# Altium PCB dsau-motherboard-revA.PcbDoc (part 1 of 4)
Units mil, origin at the board's own origin, x right, y up, seen from the top; angles counter-clockwise.
Board outline 9475 x 6400 mil, 4 copper layers (Component Side, Ground Plane, Power Plane, Solder Side), stack 65.2 mil thick; 212 components, 202 nets, 998 pads, 1047 vias.
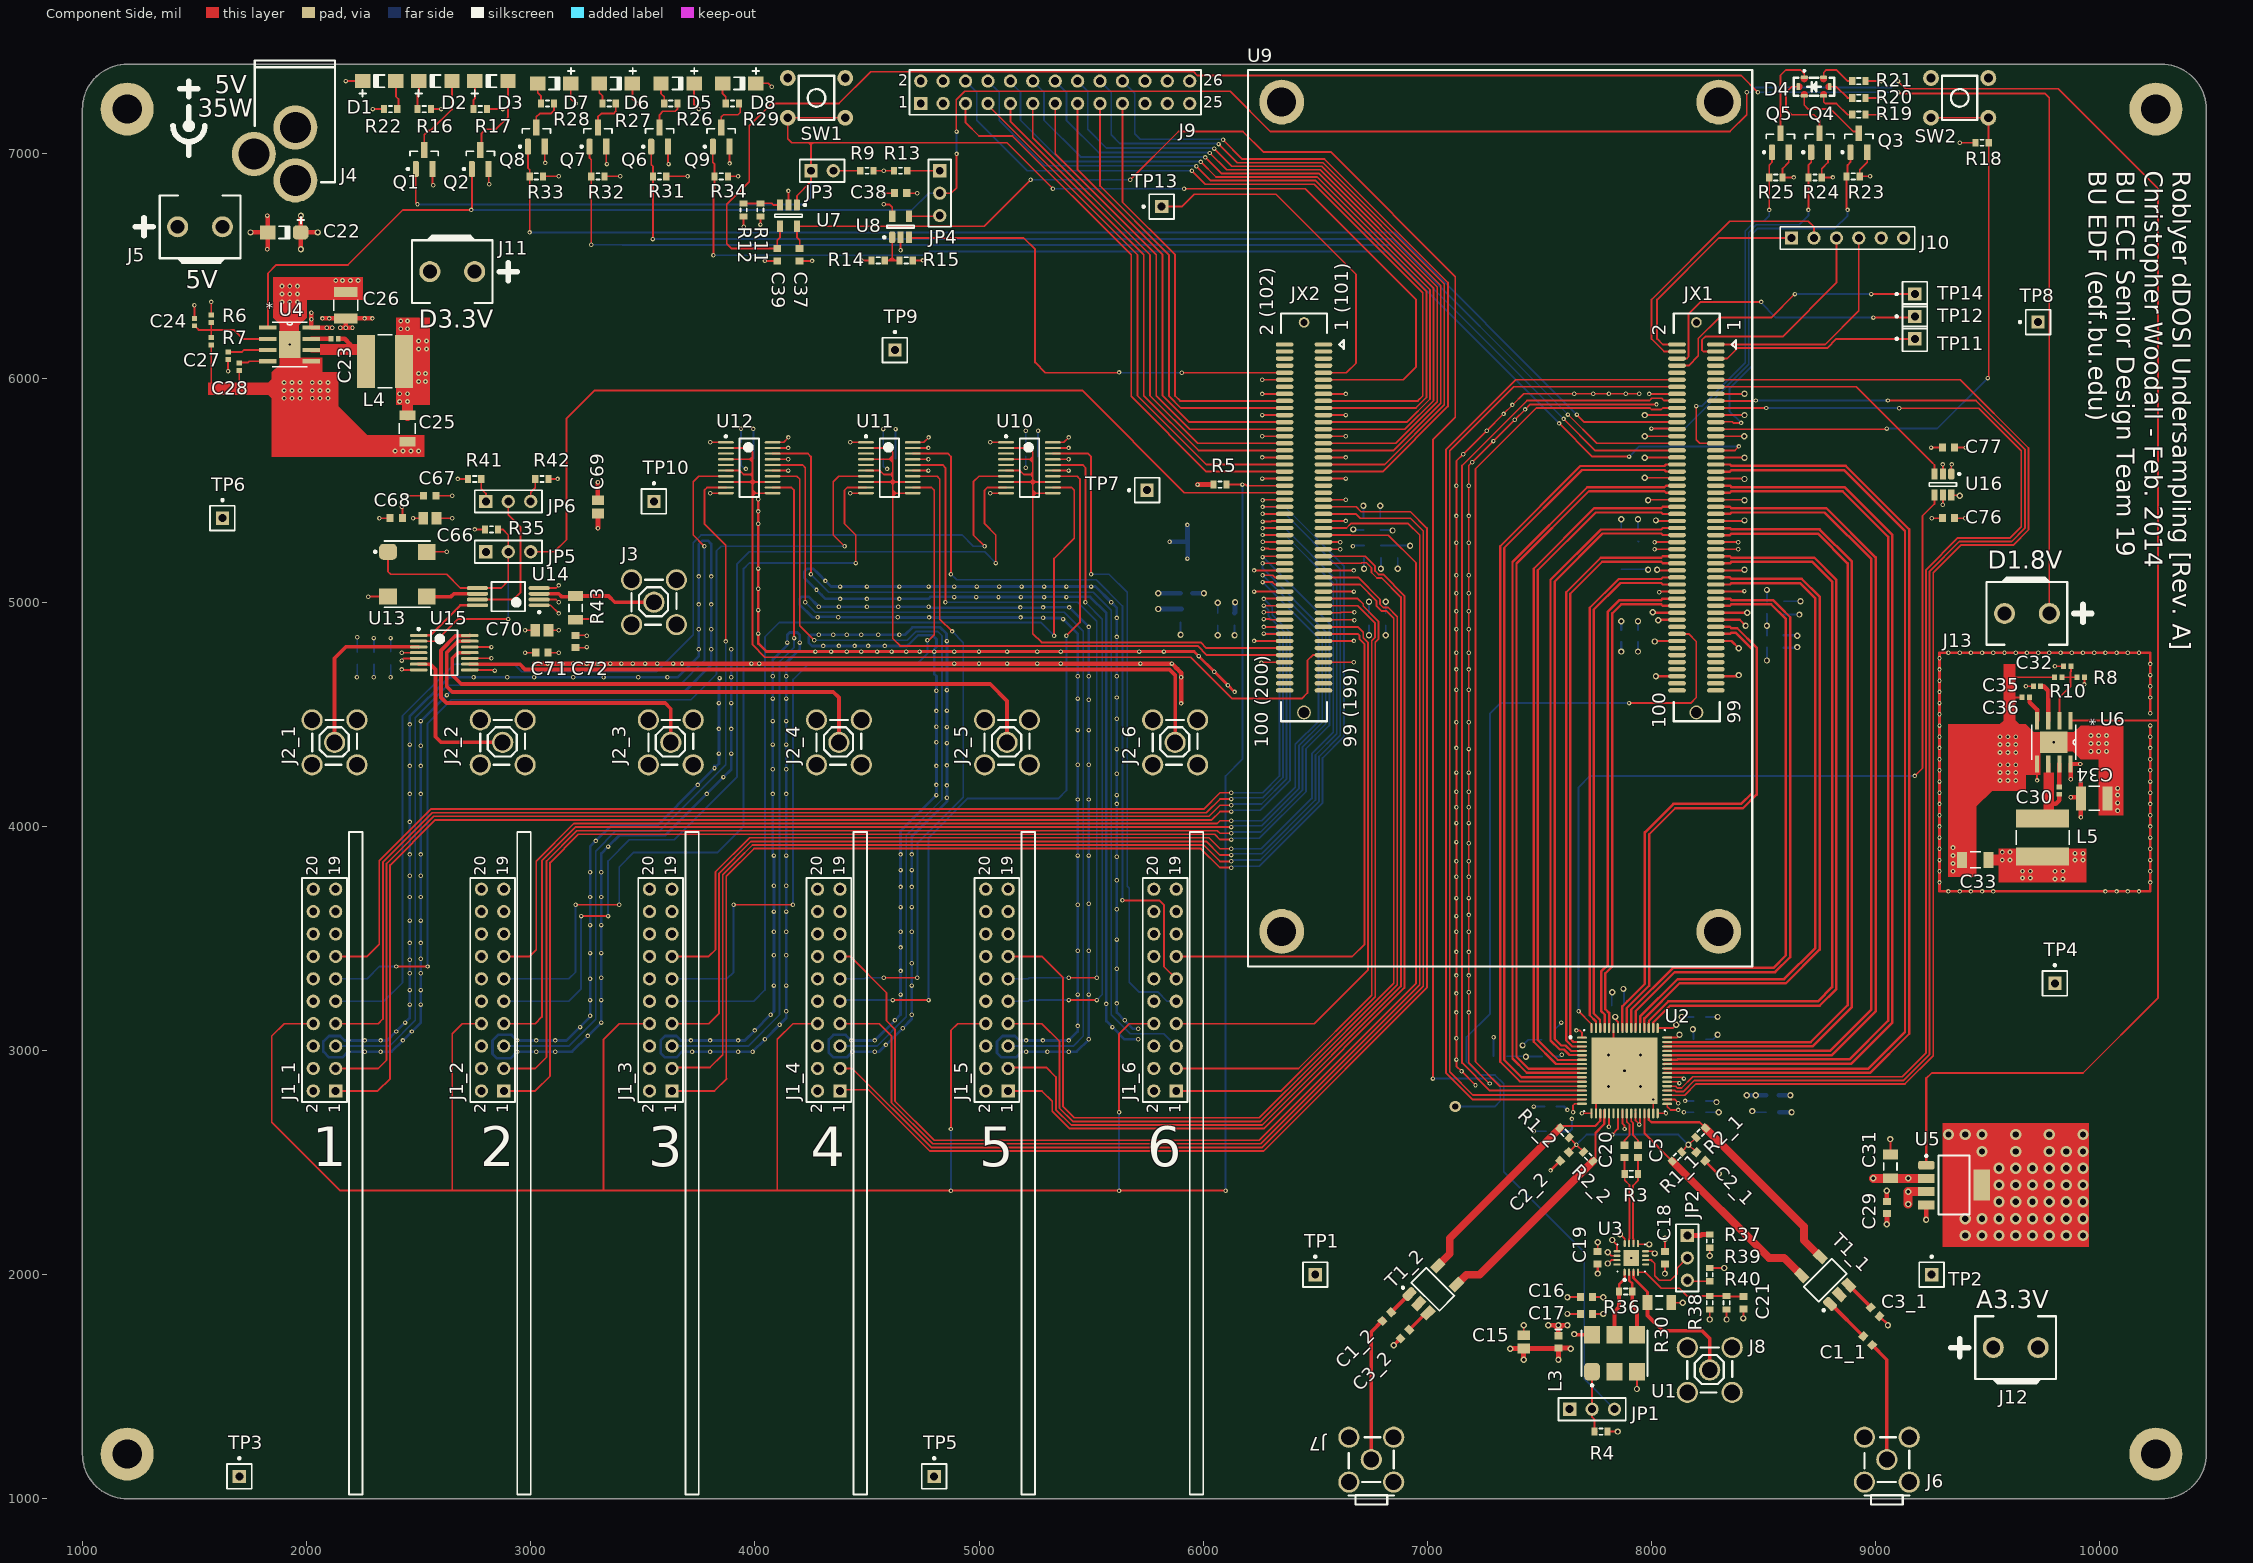
[diagram p0: Component Side view]
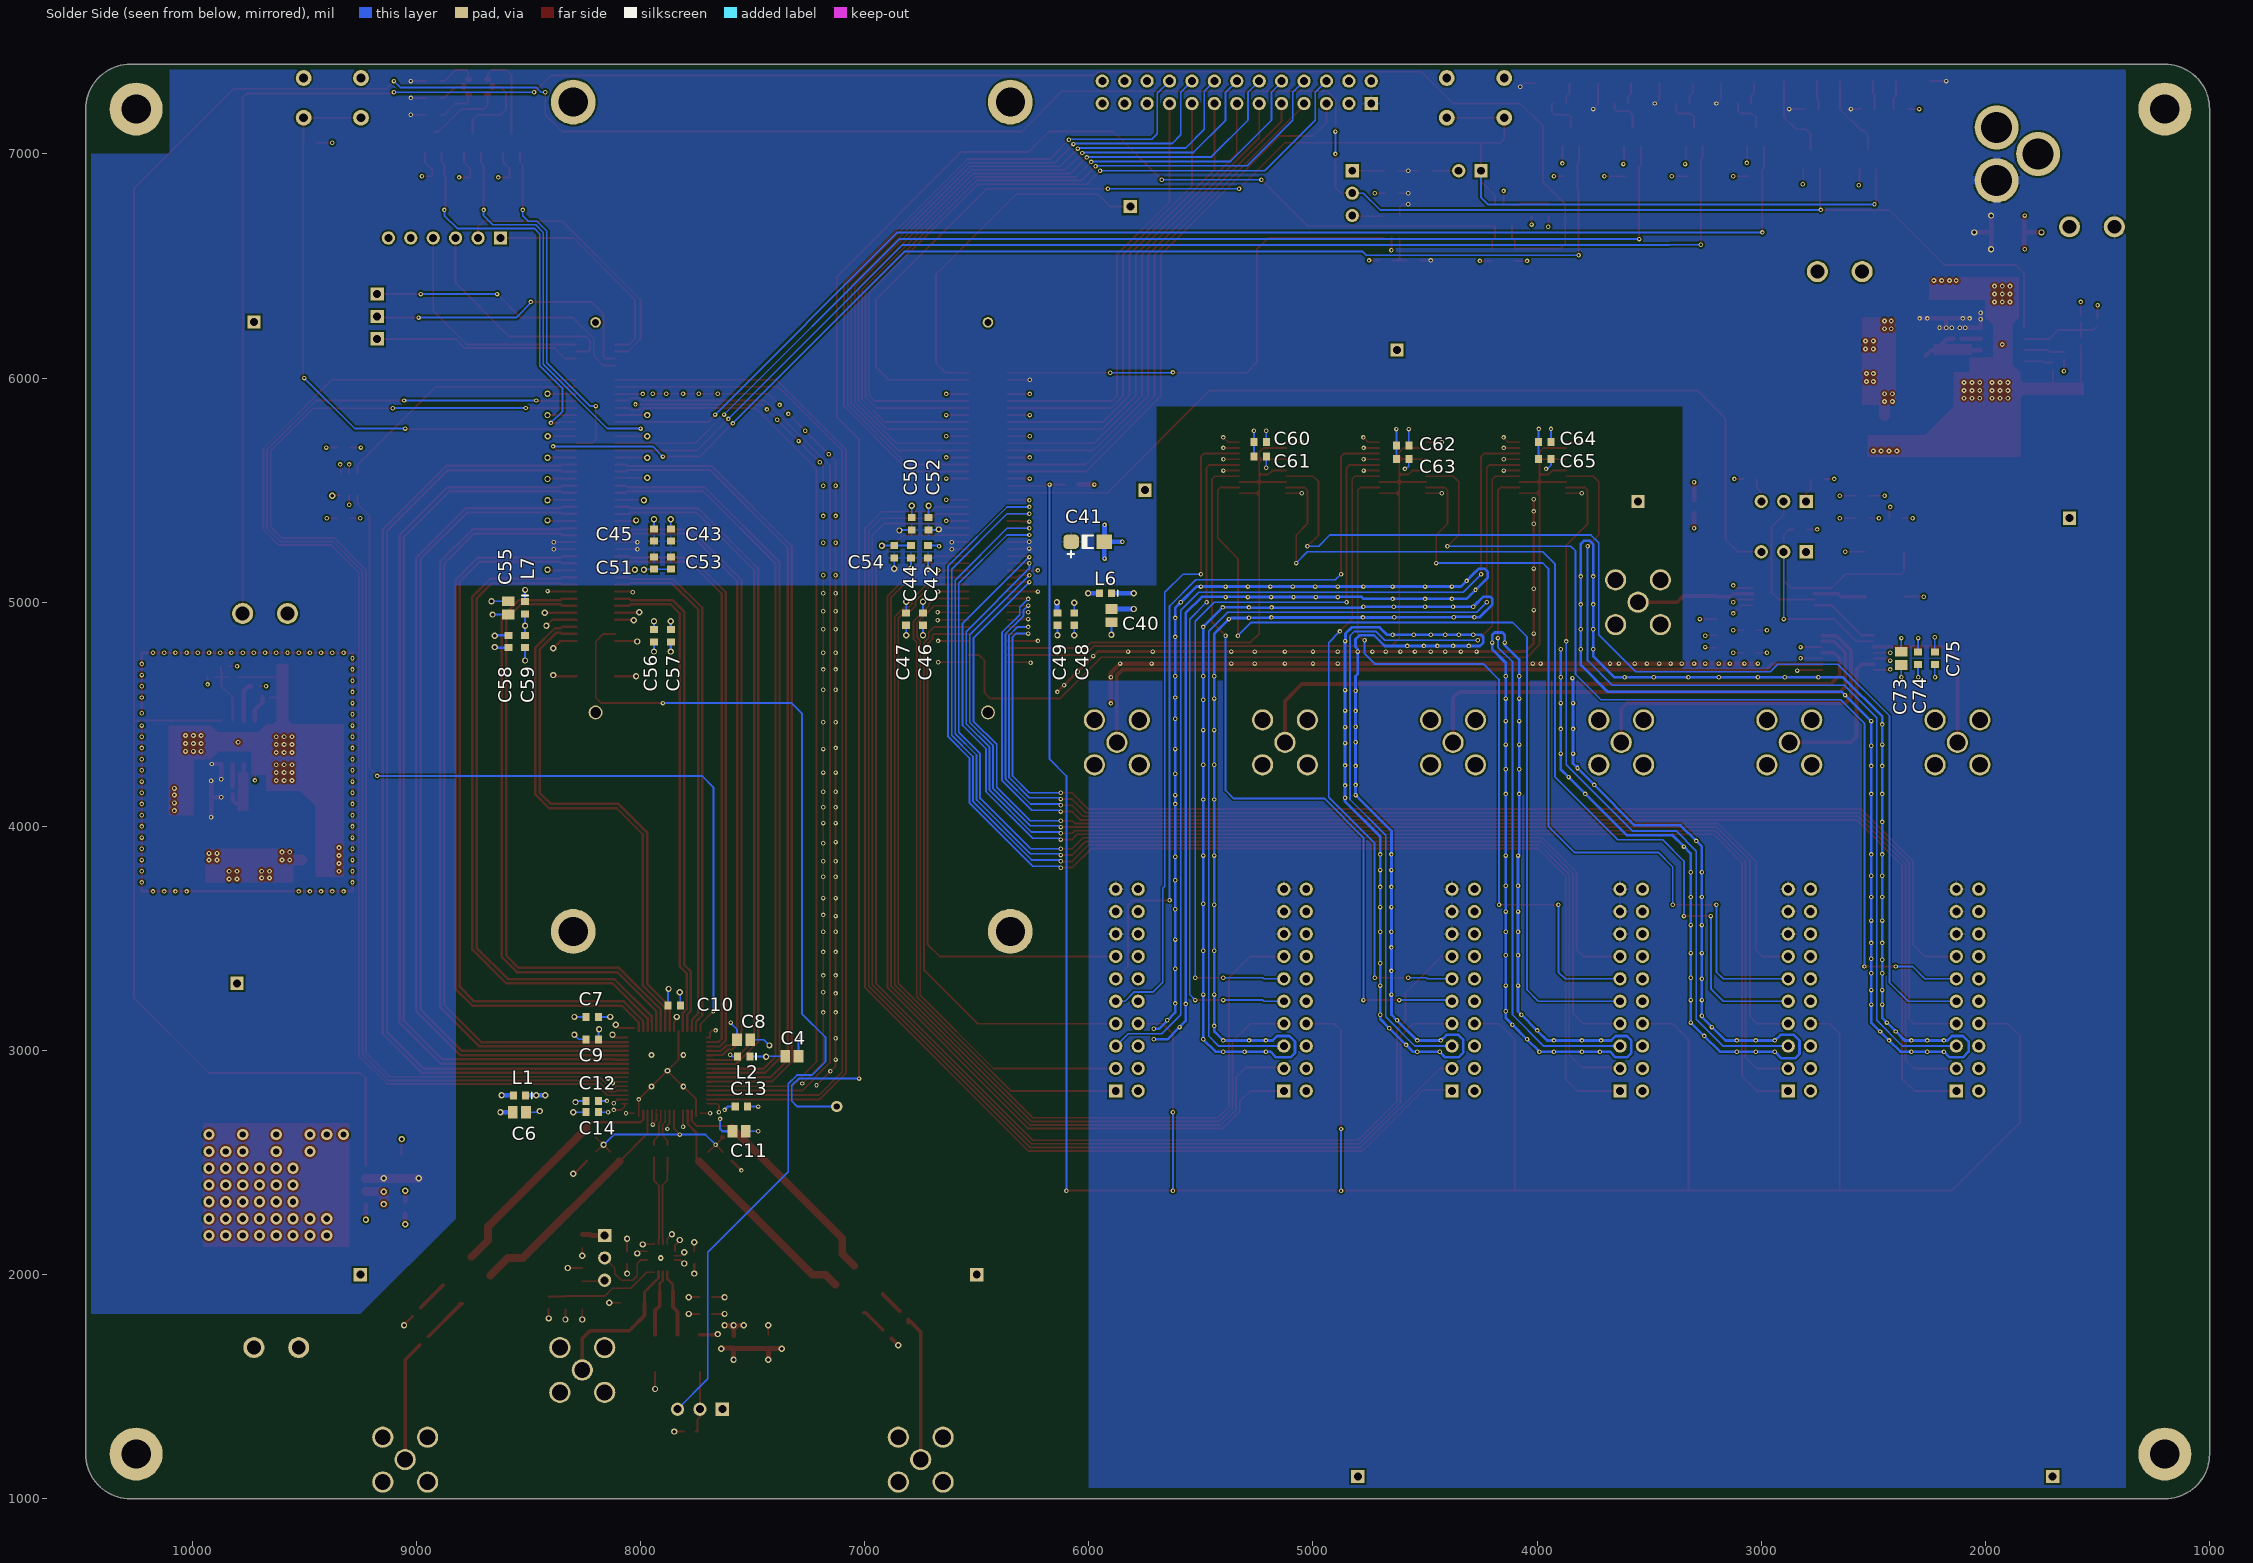
[diagram p1: Solder Side view, seen from below]
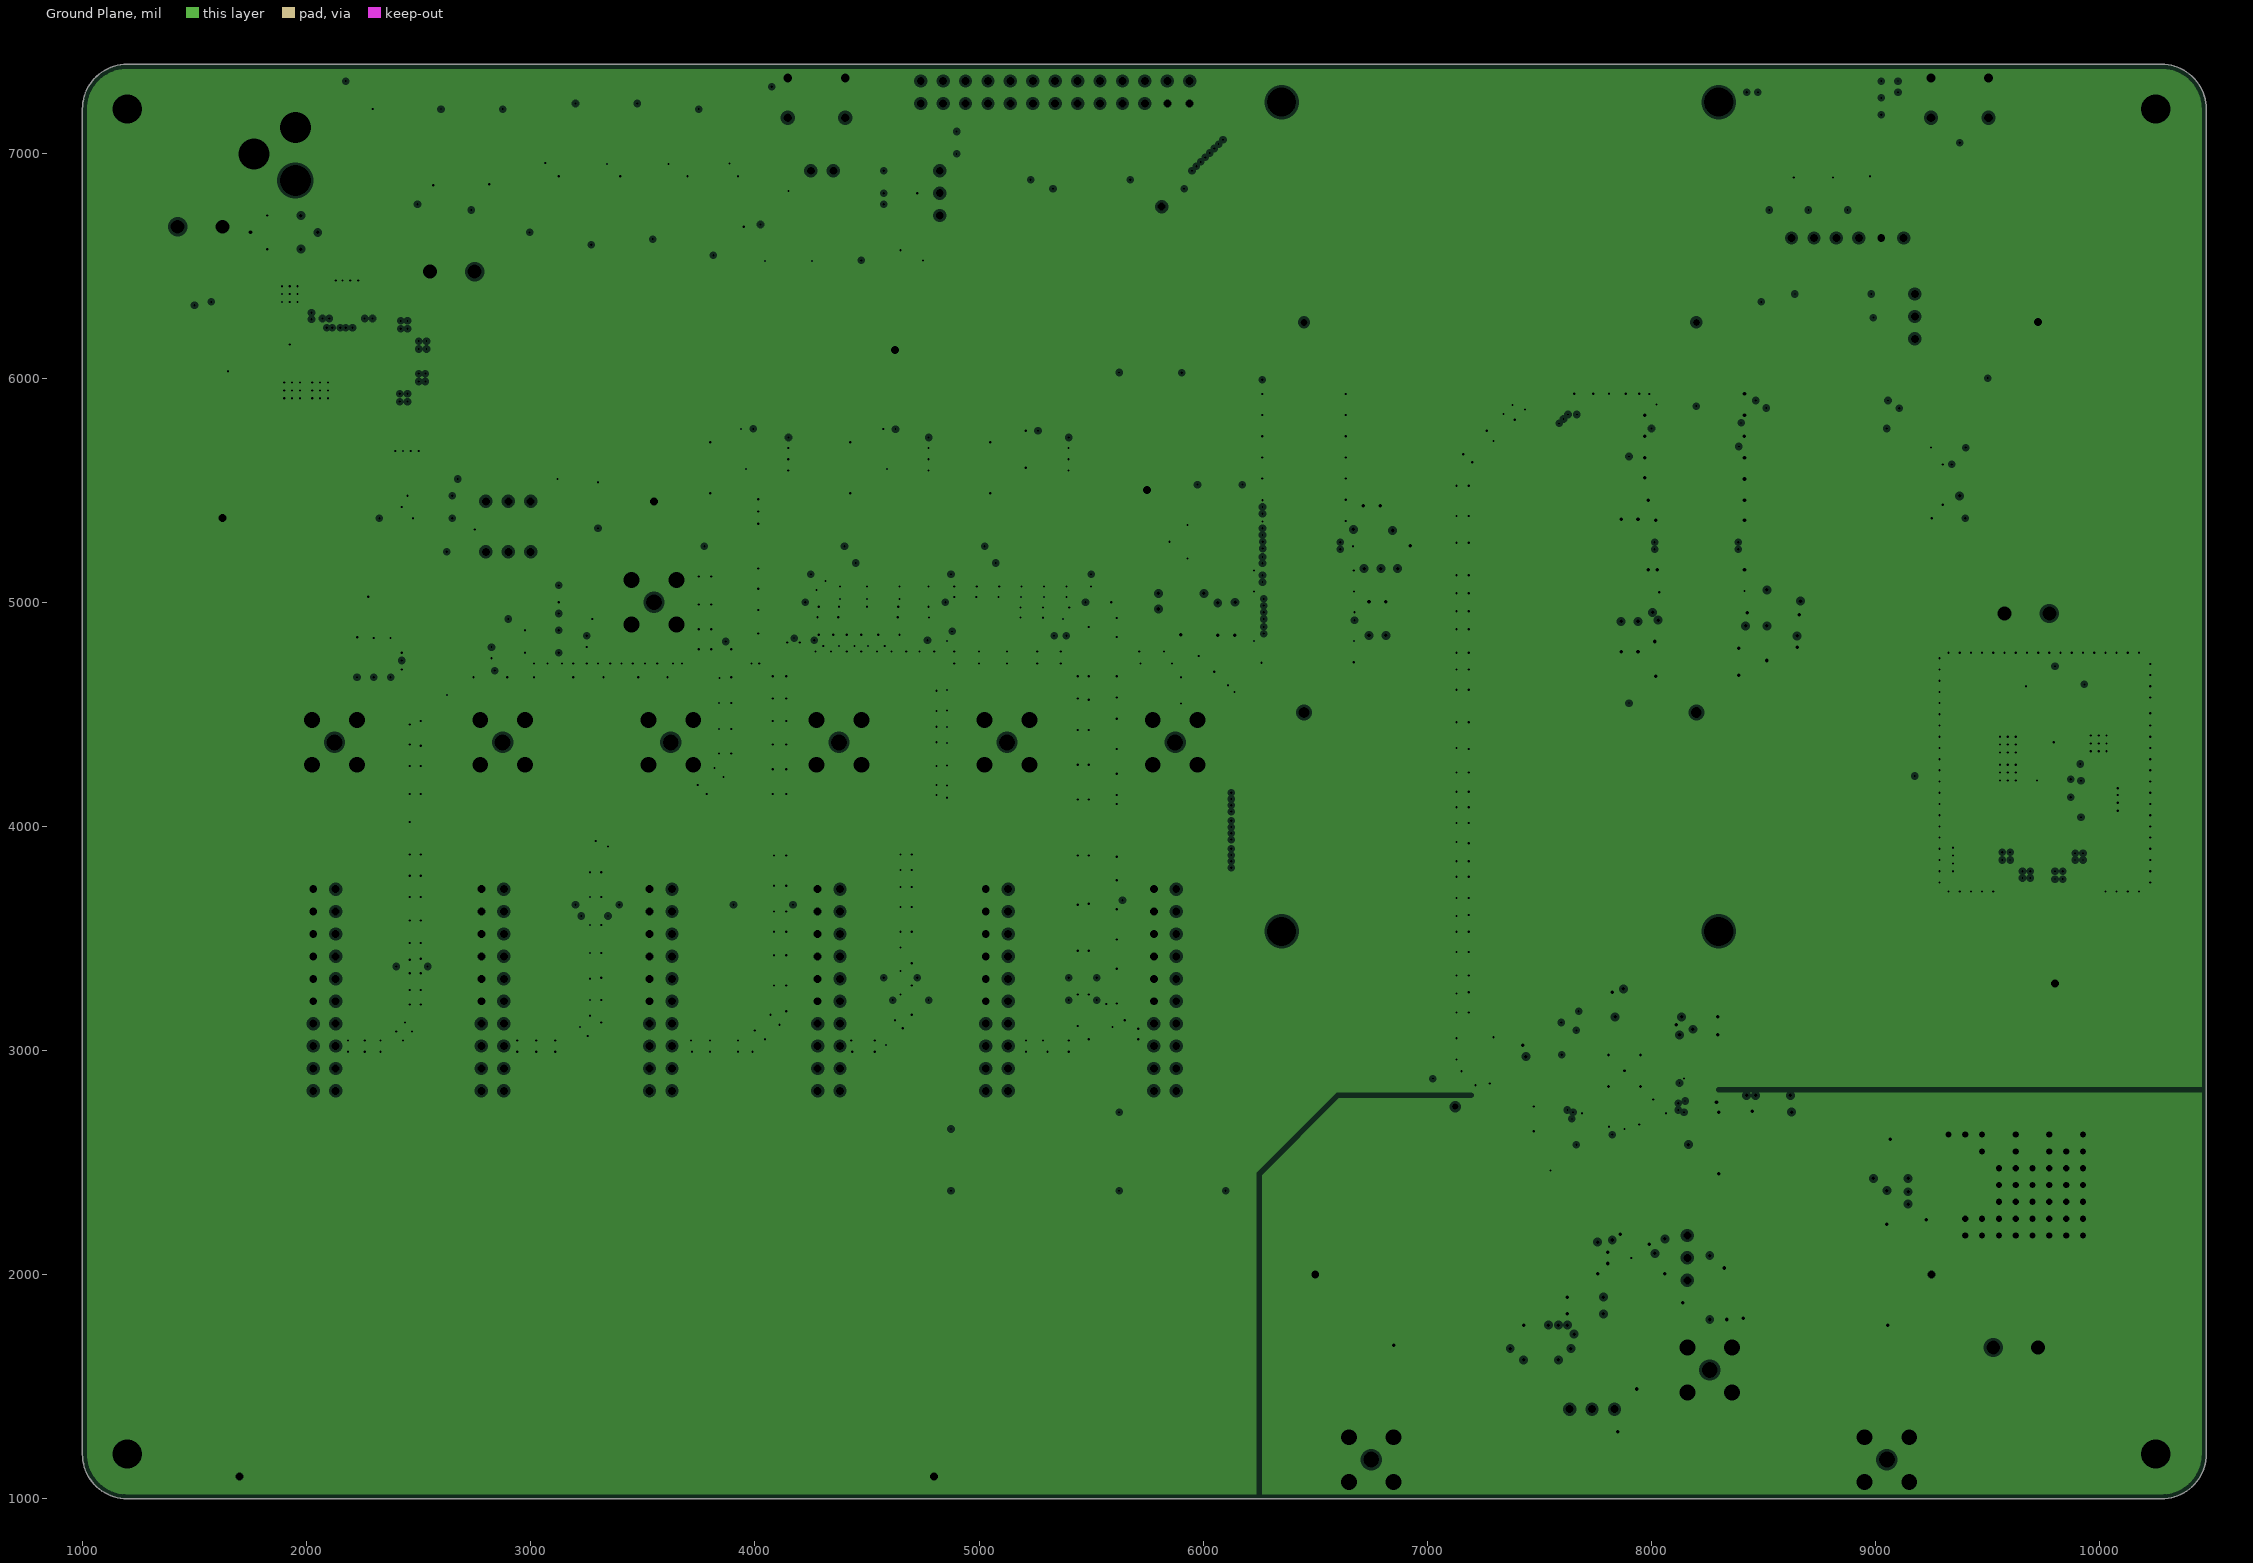
[diagram p2: Ground Plane, clearances drawn from the general rule]
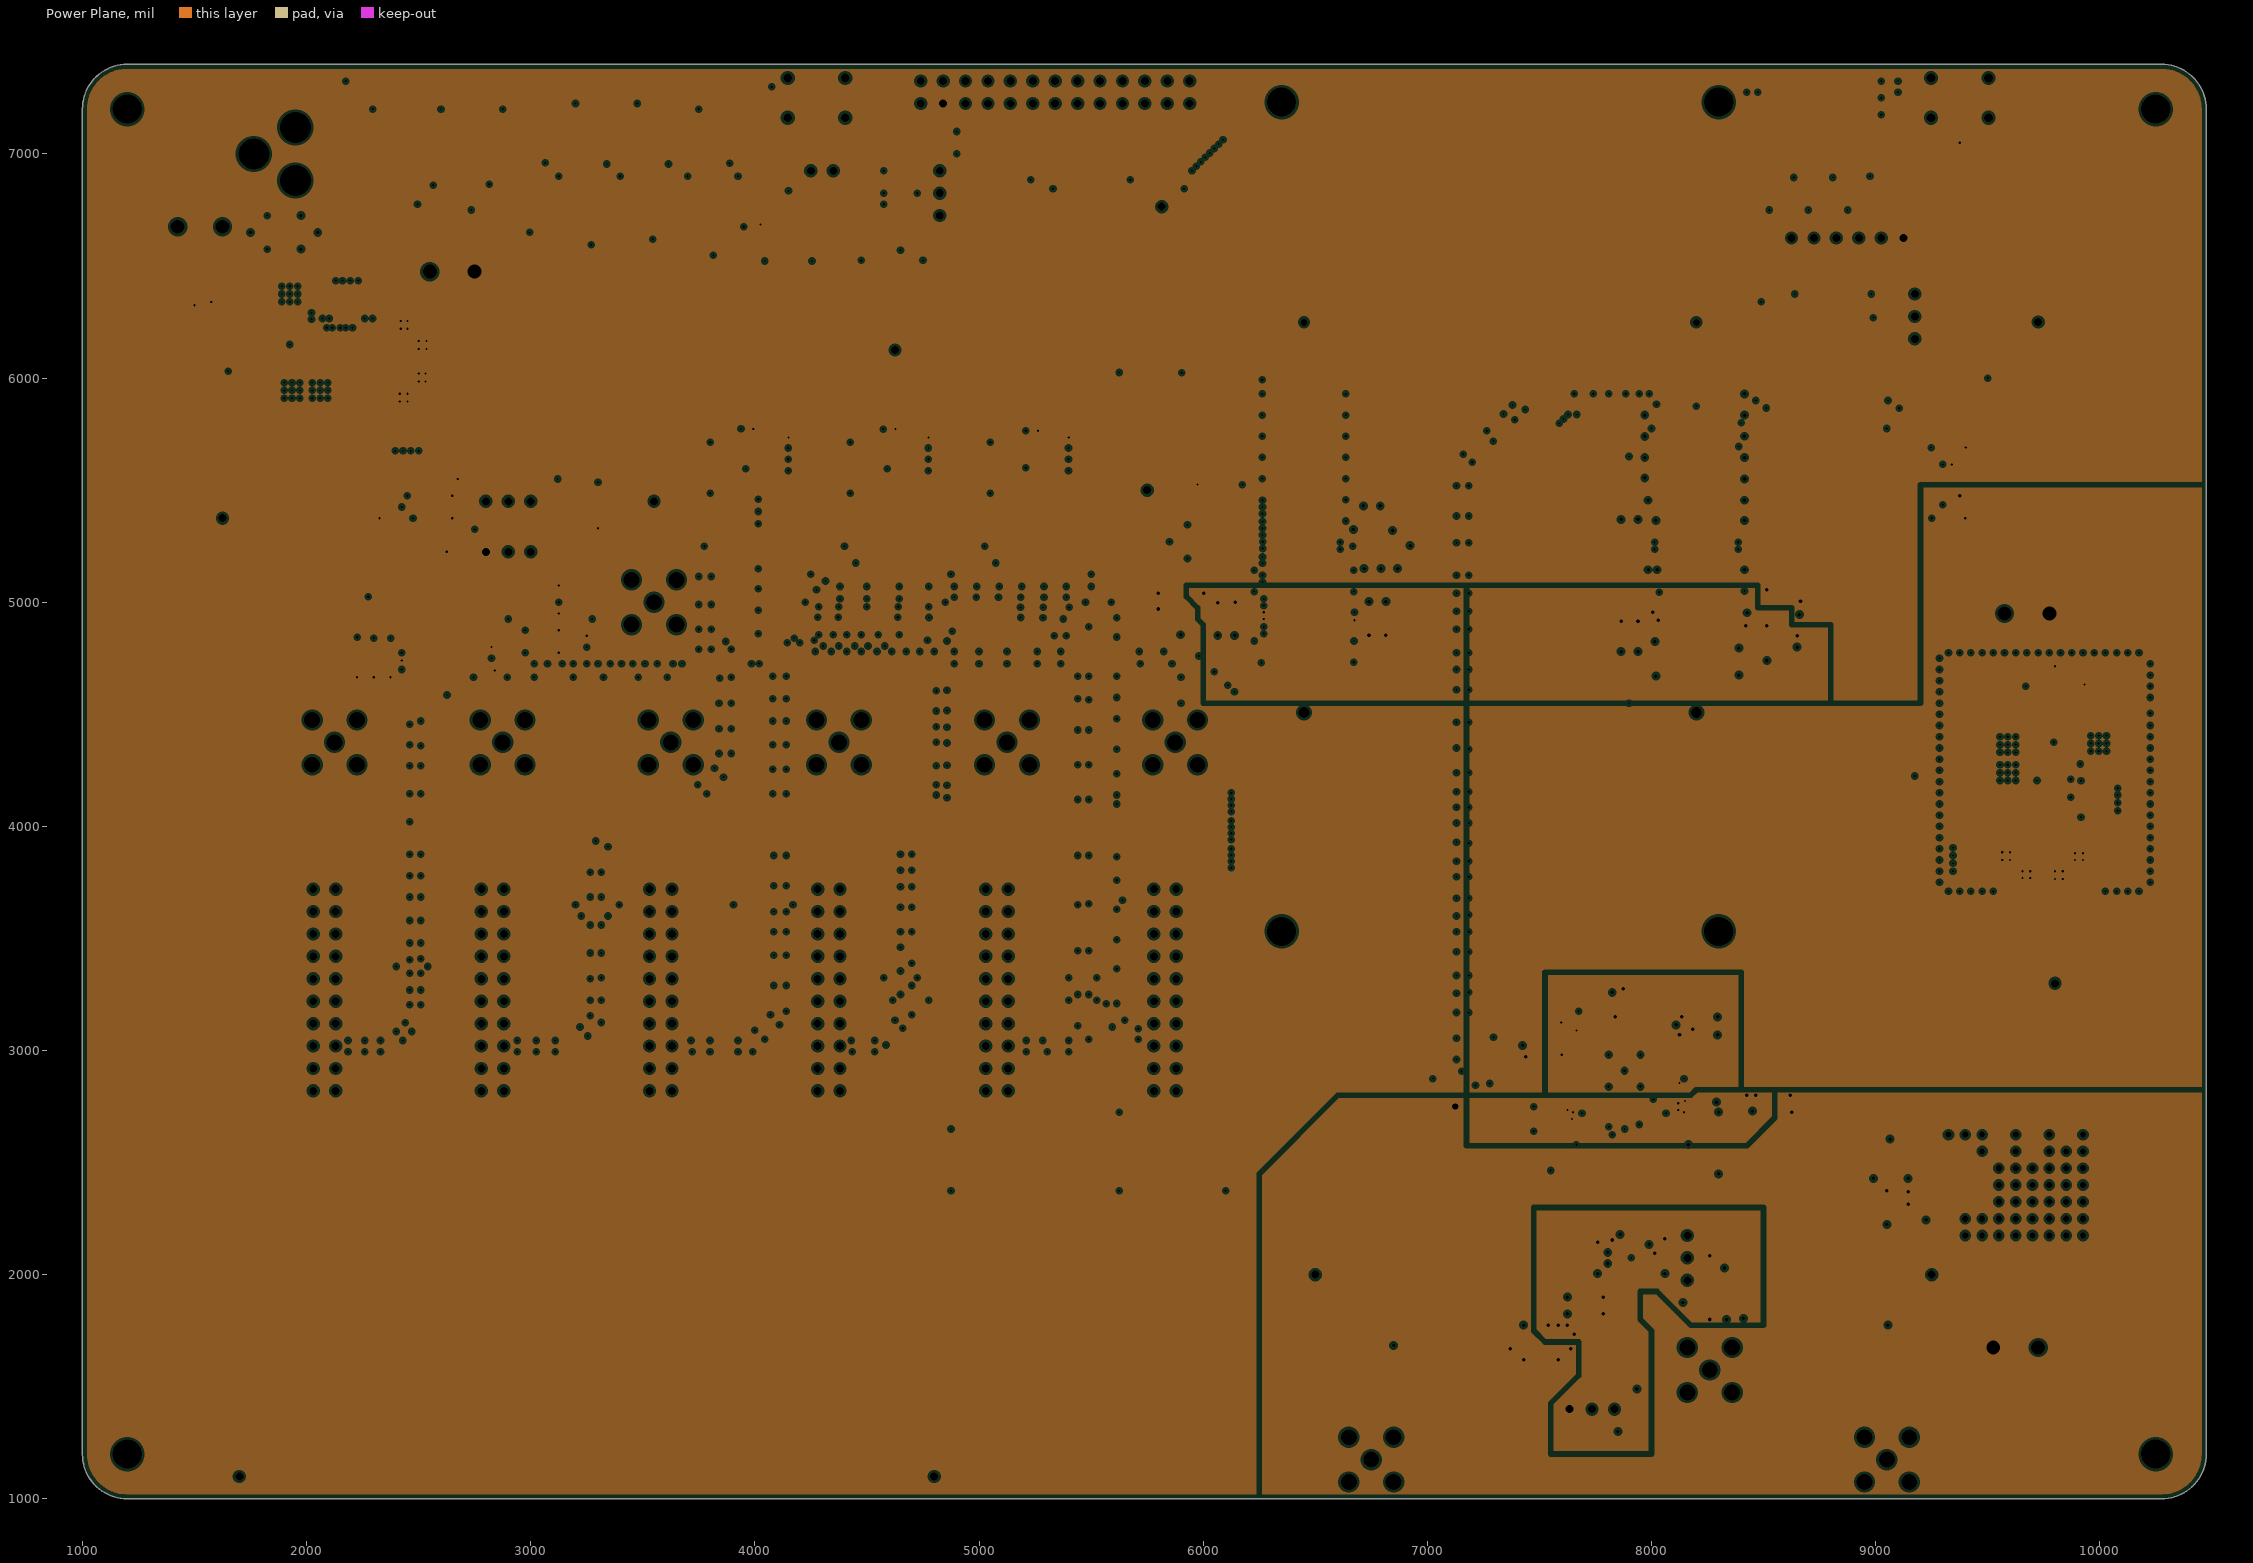
[diagram p3: Power Plane, clearances drawn from the general rule]

## Layer stack, top to bottom
Component Side: signal copper 1.4
Dielectric: prepreg 9.8, FR-4, Dk 4.3
Ground Plane: plane copper 1.4, net GND
Dielectric: core 40, FR-4, Dk 4.3
Power Plane: plane copper 1.4, net (Multiple Nets)
Dielectric: prepreg 9.8, FR-4, Dk 4.3
Solder Side: signal copper 1.4

## Board outline
1000,1200 1000,7200 cw(c1200,7200) 1200,7400 10275,7400 cw(c10275,7200) 10475,7200 10475,1200 cw(c10275,1200) 10275,1000 1200,1000 cw(c1200,1200)

## Design rules (kind name [scope] priority, off if disabled: settings)
Clearance Clearance_1 [IsPad vs IsPad] p1: gap=6
Clearance [All] p2: gap=8
DiffPairsRouting DiffPairsRouting_50Ohms [InNetClass('50OhmsDiff')] p1: maxlimit=10 minlimit=10 mostfreqgap=10 maxuncoupledlength=500
DiffPairsRouting DiffPairsRouting_100Ohms [InNetClass('100OhmsDiff')] p2: maxlimit=20 minlimit=8 mostfreqgap=8 maxuncoupledlength=500
DiffPairsRouting [All] p3: maxlimit=20 minlimit=8 mostfreqgap=8 maxuncoupledlength=500
HoleSize [All] p1: absolutevalues=TRUE maxlimit=1000 minlimit=10 maxpercent=80.000 minpercent=20.000
HoleToHoleClearance [All] p1: gap=8 allowstackedmicrovias=TRUE
MinimumSolderMaskSliver [All] p1: minsoldermaskwidth=6
PlaneClearance [All] p1: clearance=12
PlaneConnect PlaneConnect_2 [(InComponent('J4'))] p1: planeconnectstyle=Relief reliefexpansion=20 reliefentries=4 reliefconductorwidth=40 reliefairgap=10
PlaneConnect PlaneConnect_1 [IsVia] p2: planeconnectstyle=Direct reliefexpansion=20 reliefentries=4 reliefconductorwidth=10 reliefairgap=10
PlaneConnect [All] p3: planeconnectstyle=Relief reliefexpansion=20 reliefentries=4 reliefconductorwidth=10 reliefairgap=10
PolygonConnect [(InComponent('J4'))] p1: connectstyle=Relief reliefconductorwidth=40 reliefentries=4 polygonreliefangle="90 Angle"
PolygonConnect PolygonConnect_1 [IsVia] p2: connectstyle=Direct reliefconductorwidth=10 reliefentries=4 polygonreliefangle="90 Angle"
PolygonConnect PolygonConnect_5VPlane [InNet('5V')] p3: connectstyle=Relief reliefconductorwidth=10 reliefentries=4 polygonreliefangle="90 Angle"
RoomDefinition UZEDB34 [InComponentClass('UZEDB34')] p1: confinementstyle=ConfineIn formatcopy=TRUE lockcomponents=FALSE outline 9650,5000 9650,4325 9975,4325 9975,5000
RoomDefinition UZEDB35 [InComponentClass('UZEDB35')] p2: confinementstyle=ConfineIn formatcopy=TRUE lockcomponents=FALSE outline 3800,5400 5600,5400 5600,5875 3800,5875
RoomDefinition UZED [InComponentClass('UZED')] p3: confinementstyle=ConfineIn formatcopy=TRUE lockcomponents=FALSE outline 1025,925 10500,925 10500,7350 1025,7350
RoomDefinition PWR [InComponentClass('PWR')] p4: confinementstyle=ConfineIn formatcopy=TRUE lockcomponents=FALSE outline 1150,1025 10350,1025 10350,7375 1150,7375
RoomDefinition INT [InComponentClass('INT')] p5: confinementstyle=ConfineIn formatcopy=TRUE lockcomponents=FALSE outline 1025,950 10400,950 10400,7375 1025,7375
RoomDefinition dsau-motherboard-top [InComponentClass('dsau-motherboard-top')] p6: confinementstyle=ConfineIn formatcopy=TRUE lockcomponents=FALSE outline 1000,1000 10000,1000 10000,7400 1000,7400
RoomDefinition DDSCONN6 [InComponentClass('DDSCONN6')] p7: confinementstyle=ConfineIn formatcopy=TRUE lockcomponents=FALSE outline 5250,950 6000,950 6000,4550 5250,4550
RoomDefinition DDSCONN5 [InComponentClass('DDSCONN5')] p8: confinementstyle=ConfineIn formatcopy=TRUE lockcomponents=FALSE outline 4500,950 5250,950 5250,4550 4500,4550
RoomDefinition DDSCONN4 [InComponentClass('DDSCONN4')] p9: confinementstyle=ConfineIn formatcopy=TRUE lockcomponents=FALSE outline 3750,950 4500,950 4500,4550 3750,4550
RoomDefinition DDSCONN3 [InComponentClass('DDSCONN3')] p10: confinementstyle=ConfineIn formatcopy=TRUE lockcomponents=FALSE outline 3000,950 3750,950 3750,4550 3000,4550
RoomDefinition DDSCONN2 [InComponentClass('DDSCONN2')] p11: confinementstyle=ConfineIn formatcopy=TRUE lockcomponents=FALSE outline 2250,950 3000,950 3000,4550 2250,4550
RoomDefinition DDSCONN1 [InComponentClass('DDSCONN1')] p12: confinementstyle=ConfineIn formatcopy=TRUE lockcomponents=FALSE outline 1500,950 2250,950 2250,4550 1500,4550
RoomDefinition DDSCLK [InComponentClass('DDSCLK')] p13: confinementstyle=ConfineIn formatcopy=TRUE lockcomponents=FALSE outline 2250,4625 3625,4625 3625,5625 2250,5625
RoomDefinition AFE2 [InComponentClass('AFE2')] p14: confinementstyle=ConfineIn formatcopy=TRUE lockcomponents=FALSE outline 7775,1375 7775,2375 7025,2375 7025,1375
RoomDefinition AFE1 [InComponentClass('AFE1')] p15: confinementstyle=ConfineIn formatcopy=TRUE lockcomponents=FALSE outline 9525,2000 8675,2000 8675,675 9525,675
RoomDefinition ADC [InComponentClass('ADC')] p16: confinementstyle=ConfineIn formatcopy=TRUE lockcomponents=FALSE outline 7025,1375 9300,1375 9300,3575 7025,3575
RoutingVias [All] p1: holewidth=12 width=20 viastyle="Through Hole" minholewidth=12 minwidth=20 maxholewidth=12 maxwidth=20
SilkscreenOverComponentPads [All] p1: minsilkscreentomaskgap=10
SolderMaskExpansion ViaSolderMask [IsVia] p1: expansion=1
SolderMaskExpansion [All] p2: expansion=3
Width Width_25Ohms [InNetClass('50OhmsDiff')] p1: maxlimit=40.54 minlimit=8.39 preferedwidth=35.12 impedancedriven=TRUE minimp=20.000000 maximp=72.000000 favimp=25.000000
Width Width_50Ohms [InNetClass('50OhmsSingle')] p2: maxlimit=22.67 minlimit=11.23 preferedwidth=16.8 impedancedriven=TRUE minimp=40.000000 maximp=63.000000 favimp=50.000000
Width Width_100Ohms [InNetClass('100OhmsDiff')] p3: maxlimit=20 minlimit=8 preferedwidth=11 minimp=50.000000 maximp=50.000000 favimp=50.000000
Width [InNetClass('All Nets')] p4: maxlimit=60 minlimit=8 preferedwidth=8 minimp=50.000000 maximp=50.000000 favimp=50.000000
21 further rules are at their usual default settings.

## Classes and differential pairs
channel class dsau-dds-connector: DDSCONN1 DDSCONN2 DDSCONN3 DDSCONN4 DDSCONN5 DDSCONN6
channel class dsau-adc-frontend: AFE1 AFE2
net class PowerNet: 5V A3V3 D1V8 D3V3 NetC46_1 NetC56_1
net class GPIO[15..0]: GPIO0 GPIO1 GPIO2 GPIO3 GPIO4 GPIO5 GPIO6 GPIO7 GPIO8 GPIO9 GPIO10 GPIO11 GPIO12 GPIO13 GPIO14 GPIO15
net class CLK_OUT[5..0]: CLK_OUT0 CLK_OUT1 CLK_OUT2 CLK_OUT3 CLK_OUT4 CLK_OUT5
net class 100OhmsDiff: ADCCLK1_N ADCCLK1_P ADCCLK2_N ADCCLK2_P ADCCLK_N ADCCLK_P CLKOUT_N CLKOUT_P DA0_N DA0_P DA2_N DA2_P DA4_N DA4_P DA6_N DA6_P DA8_N DA8_P DA10_N DA10_P DA12_N DA12_P DB0_N DB0_P DB2_N DB2_P DB4_N DB4_P DB6_N DB6_P DB8_N DB8_P DB10_N DB10_P DB12_N DB12_P
net class 50OhmsSingle: CLK_OUT0 CLK_OUT1 CLK_OUT2 CLK_OUT3 CLK_OUT4 CLK_OUT5 NetC1_1_1 NetC1_1_2 NetC1_2_1 NetC1_2_2 NetC3_1_2 NetC3_2_2 NetJ3_1 NetJ8_1 NetU13_3 NetU14_8
net class 50OhmsDiff: INPUTA_N INPUTA_P INPUTB_N INPUTB_P
component class UZED: C40 C41 C42 C43 C44 C45 C46 C47 C48 C49 C50 C51 C52 C53 C54 C55 C56 C57 C58 C59 L6 L7 TP11 TP12 TP13 TP14 U9
component class UZEDB35: C60 C61 C62 C63 C64 C65 U10 U11 U12
component class PWR: C23 C24 C25 C26 C27 C28 C29 C30 C31 C32 C33 C34 C35 C36 C37 C38 C39 J11 J12 J13 JP3 JP4 L4 L5 R6 R7 R8 R9 R10 R11 R12 R13 R14 R15 SW1 TP1 TP2 TP3 TP4 TP5 TP6 TP7 TP8 TP9 TP10 U4 U5 U6 U7 U8
component class INT: D1 D2 D3 D4 D5 D6 D7 D8 Q1 Q2 Q3 Q4 Q5 Q6 Q7 Q8 Q9 R16 R17 R18 R19 R20 R21 R22 R23 R24 R25 R26 R27 R28 R29 R31 R32 R33 R34 SW2
component class dsau-motherboard-top: C22 J3 J4 J5 J6 J7 J8 J9 J10 R5
component class DDSCONN6: J1_6 J2_6
component class DDSCONN5: J1_5 J2_5
component class DDSCONN4: J1_4 J2_4
component class DDSCONN3: J1_3 J2_3
component class DDSCONN2: J1_2 J2_2
component class DDSCONN1: J1_1 J2_1
component class DDSCLK: C66 C67 C68 C69 C70 C71 C72 C73 C74 C75 JP5 JP6 R35 R41 R42 R43 U13 U14 U15
component class AFE2: C1_2 C2_2 C3_2 R1_2 R2_2 T1_2
component class AFE1: C1_1 C2_1 C3_1 R1_1 R2_1 T1_1
component class ADC: C4 C5 C6 C7 C8 C9 C10 C11 C12 C13 C14 C15 C16 C17 C18 C19 C20 C21 JP1 JP2 L1 L2 L3 R3 R4 R30 R36 R37 R38 R39 R40 U1 U2 U3
component class UZEDB34: C76 C77 U16
differential pair INPUTB: +INPUTB_P -INPUTB_N
differential pair INPUTA: +INPUTA_P -INPUTA_N
differential pair DB12: +DB12_P -DB12_N
differential pair DB10: +DB10_P -DB10_N
differential pair DB8: +DB8_P -DB8_N
differential pair DB6: +DB6_P -DB6_N
differential pair DB4: +DB4_P -DB4_N
differential pair DB2: +DB2_P -DB2_N
differential pair DB0: +DB0_P -DB0_N
differential pair DA12: +DA12_P -DA12_N
differential pair DA10: +DA10_P -DA10_N
differential pair DA8: +DA8_P -DA8_N
differential pair DA6: +DA6_P -DA6_N
differential pair DA4: +DA4_P -DA4_N
differential pair DA2: +DA2_P -DA2_N
differential pair DA0: +DA0_P -DA0_N
differential pair CLKOUT: +CLKOUT_P -CLKOUT_N
differential pair ADCCLK: +ADCCLK_P -ADCCLK_N
differential pair ADCCLK2: +ADCCLK2_P -ADCCLK2_N
differential pair ADCCLK1: +ADCCLK1_P -ADCCLK1_N

## Components (designator, comment, footprint, x,y, rotation, side; value= is the part's Value field where it differs from the comment)
C1_1 "CER 0.1UF 50V Y5V" CAPC1608L 8965,1706 r135 top (schematic designator C1)
C1_2 "CER 0.1UF 50V Y5V" CAPC1608L 6819,1813 r45 top (schematic designator C1)
C2_1 "CER 0.1UF 50V Y5V" CAPC1608L 8220.03,2526.97 r315 top (schematic designator C2)
C2_2 "CER 0.1UF 50V Y5V" CAPC1608L 7611.97,2526.97 r225 top (schematic designator C2)
C3_1 "CER 0.1UF 50V Y5V" CAPC1608L 8998,1834 r135 top (schematic designator C3)
C3_2 "CER 0.1UF 50V Y5V" CAPC1608L 6900,1735 r45 top (schematic designator C3)
C4 "TANT 33UF 6.3V 10%" CAPC2012L 7325,2975 r180 bottom
C5 "CER 0.1UF 50V Y5V" CAPC1608L 7940,2550 r90 top
C6 "TANT 33UF 6.3V 10%" CAPC2012L 8540.03,2725 r180 bottom
C7 "CER 0.1UF 50V Y5V" CAPC1608L 8215,3150 r0 bottom
C8 "CER 1UF 16V 10% X7R" CAPC2012L 7540.03,3047.88 r180 bottom
C9 "CER 10NF 25V 10% NP0" CAPC1608L 8215.03,3050 r0 bottom
C10 "CER 10PF 50V 5% NP0" CAPC1608L 7850,3200 r180 bottom
C11 "CER 1UF 16V 10% X7R" CAPC2012L 7560,2640 r180 bottom
C12 "CER 0.1UF 50V Y5V" CAPC1608L 8215.03,2775 r0 bottom
C13 "CER 10NF 25V 10% NP0" CAPC1608L 7550,2750 r180 bottom
C14 "CER 10PF 50V 5% NP0" CAPC1608L 8215.03,2725 r0 bottom
C15 "TANT 33UF 6.3V 10%" CAPC2012L 7430,1700 r90 top
C16 "CER 10NF 25V 10% NP0" CAPC1608L 7710,1900 r180 top
C17 "CER 0.1UF 50V Y5V" CAPC1608L 7710,1825 r180 top
C18 "CER 0.1UF 50V Y5V" CAPC1608L 8060,2075 r270 top
C19 "CER 0.1UF 50V Y5V" CAPC1608L 7760,2075 r270 top
C20 "CER 0.1UF 50V Y5V" CAPC1608L 7880,2550 r90 top
C21 "CER 0.1UF 50V Y5V" CAPC1608L 8410,1875 r270 top
C22 "TANT 100UF 10V 20%" CAPPOL3216 1900,6650 r180 top
C23 "100nF" 0402 2125,6175 r0 top
C24 "5.1pF" 0402 1500,6250 r270 top
C25 "47uF" 1206 2450,5775 r270 top
C26 "22uF" 1210 2175,6325 r90 top
C27 "1uF" 0402 1650,6100 r270 top
C28 "8.2nF" 0402 1700,6050 r270 top
C29 "CER 10UF 6.3V 20% X5R" CAPC1608L 9050,2300 r90 top
C30 "100nF" 0402 9820,4160 r270 top
C31 "CER 68UF 6.3V 20% X5R" CAPC3216L 9066,2483 r270 top
C32 "5.1pF" 0402 9855,4714.65 r0 top
C33 "47uF" 1206 9445,3850.35 r180 top
C34 "22uF" 1210 9975,4125 r0 top
C35 "1uF" 0402 9720,4625.35 r180 top
C36 "8.2nF" 0402 9670,4575.35 r180 top
C37 "CER 0.1UF 50V Y5V" CAPC1608L 4200,6550 r270 top
C38 "CER 0.1UF 50V Y5V" CAPC1608L 4650,6825 r0 top
C39 "CER 0.1UF 50V Y5V" CAPC1608L 4100,6550 r90 top
C40 "TANT 33UF 6.3V 10%" CAPC2012L 5899.21,4940 r270 bottom
C41 "TANT 100UF 10V 20%" CAPPOL3216 6005,5270 r180 bottom
C42 "CER 0.1UF 50V Y5V" CAPC1608L 6718,5225 r90 bottom
C43 "CER 0.1UF 50V Y5V" CAPC1608L 7865.02,5300 r90 bottom
C44 "CER 0.1UF 50V Y5V" CAPC1608L 6793,5225 r90 bottom
C45 "CER 0.1UF 50V Y5V" CAPC1608L 7940.02,5300 r90 bottom
C46 "CER 0.1UF 50V Y5V" CAPC1608L 6740.02,4925 r90 bottom
C47 "CER 0.1UF 50V Y5V" CAPC1608L 6815.02,4925 r90 bottom
C48 "CER 10NF 25V 10% NP0" CAPC1608L 6065.02,4925 r270 bottom
C49 "CER 10PF 50V 5% NP0" CAPC1608L 6140.02,4925 r270 bottom
C50 "CER 10PF 50V 5% NP0" CAPC1608L 6790,5350 r90 bottom
C51 "CER 10PF 50V 5% NP0" CAPC1608L 7940.02,5175 r270 bottom
C52 "CER 10NF 25V 10% NP0" CAPC1608L 6715,5350 r90 bottom
C53 "CER 10NF 25V 10% NP0" CAPC1608L 7865.02,5175 r270 bottom
C54 "CER 10NF 25V 10% NP0" CAPC1608L 6868,5225 r90 bottom
C55 "TANT 33UF 6.3V 10%" CAPC2012L 8590.02,4975 r270 bottom
C56 "CER 0.1UF 50V Y5V" CAPC1608L 7940.02,4850 r270 bottom
C57 "CER 0.1UF 50V Y5V" CAPC1608L 7865.02,4850 r270 bottom
C58 "CER 10NF 25V 10% NP0" CAPC1608L 8590.02,4825 r270 bottom
C59 "CER 10PF 50V 5% NP0" CAPC1608L 8515.02,4825 r270 bottom
C60 "CER 0.1UF 50V Y5V" CAPC1608L 5235.79,5715 r0 bottom
C61 "CER 10NF 25V 10% NP0" CAPC1608L 5235.79,5650 r180 bottom
C62 "CER 0.1UF 50V Y5V" CAPC1608L 4600,5699.98 r0 bottom
C63 "CER 10NF 25V 10% NP0" CAPC1608L 4600,5639.98 r180 bottom
C64 "CER 0.1UF 50V Y5V" CAPC1608L 3965.79,5715 r0 bottom
C65 "CER 10NF 25V 10% NP0" CAPC1608L 3965.79,5640 r180 bottom
C66 "CER 1UF 16V 10% X7R" CAPC2012L 2550,5375 r180 top
C67 "CER 0.1UF 50V Y5V" CAPC1608L 2550,5475 r180 top
C68 "CER 10PF 50V 5% NP0" CAPC1608L 2400,5375 r0 top
C69 "TANT 33UF 6.3V 10%" CAPC2012L 3300,5425 r90 top
C70 "CER 1UF 16V 10% X7R" CAPC2012L 3050,4875 r180 top
C71 "CER 0.1UF 50V Y5V" CAPC1608L 3050,4775 r180 top
C72 "CER 10PF 50V 5% NP0" CAPC1608L 3200,4825 r270 top
C73 "CER 1UF 16V 10% X7R" CAPC2012L 2375.85,4750 r90 bottom
C74 "CER 0.1UF 50V Y5V" CAPC1608L 2300.85,4750 r90 bottom
C75 "CER 10PF 50V 5% NP0" CAPC1608L 2225.85,4750 r90 bottom
C76 "CER 0.1UF 50V Y5V" CAPC1608L 9325,5375 r0 top
C77 "CER 0.1UF 50V Y5V" CAPC1608L 9325,5690 r180 top
D1 "YELLOW" LED3216X08M 2325,7325 r0 top
D2 "YELLOW" LED3216X08M 2575,7325 r0 top
D3 "YELLOW" LED3216X08M 2825,7325 r0 top
D4 "kingbright_1206_RGBLED" RGBLED_1206_KINGSBRIGHT 8725,7300 r90 top
D5 "GREEN" LED3216X08M 3655,7315 r180 top
D6 "GREEN" LED3216X08M 3380,7315 r180 top
D7 "GREEN" LED3216X08M 3105,7315 r180 top
D8 "GREEN" LED3216X08M 3930,7315 r180 top
J1_1 "Header 10X2" HDR2X10 2130,2820 r90 top (schematic designator J1)
J1_2 "Header 10X2" HDR2X10 2880,2820 r90 top (schematic designator J1)
J1_3 "Header 10X2" HDR2X10 3630,2820 r90 top (schematic designator J1)
J1_4 "Header 10X2" HDR2X10 4380,2820 r90 top (schematic designator J1)
J1_5 "Header 10X2" HDR2X10 5130,2820 r90 top (schematic designator J1)
J1_6 "Header 10X2" HDR2X10 5880,2820 r90 top (schematic designator J1)
J2_1 "SMB 50 OHM VERT" MOLEX_SMBVERT_731000207 2125,4375 r0 top (schematic designator J2)
J2_2 "SMB 50 OHM VERT" MOLEX_SMBVERT_731000207 2875,4375 r0 top (schematic designator J2)
J2_3 "SMB 50 OHM VERT" MOLEX_SMBVERT_731000207 3625,4375 r0 top (schematic designator J2)
J2_4 "SMB 50 OHM VERT" MOLEX_SMBVERT_731000207 4375,4375 r0 top (schematic designator J2)
J2_5 "SMB 50 OHM VERT" MOLEX_SMBVERT_731000207 5125,4375 r0 top (schematic designator J2)
J2_6 "SMB 50 OHM VERT" MOLEX_SMBVERT_731000207 5875,4375 r0 top (schematic designator J2)
J3 "SMA 50 OHM VERT" MOLEX_SMBVERT_731000207 3550,5000 r0 top
J4 "2.5X5.5MM HIGH CUR" PJ-002BH 1950,7000 r0 top
J5 "DNP. VERT 2POS .2\" TIN" MOLEX_2POS_200mil_0010085021 1525,6675 r180 top
J6 "SMA 50 OHM R/A" MOLEX_SMBRA_731000103 9050,1175 r180 top
J7 "SMA 50 OHM R/A" MOLEX_SMBRA_731000103 6750,1175 r180 top
J8 "SMA 50 OHM VERT" MOLEX_SMBVERT_731000207 8260,1575 r0 top
J9 "Header 13X2" HDR2X13 4740,7225 r0 top
J10 "Header 6" HDR1X6 8625,6625 r0 top
J11 "DNP. VERT 2POS .2\" TIN" MOLEX_2POS_200mil_0010085021 2650,6475 r0 top
J12 "DNP. VERT 2POS .2\" TIN" MOLEX_2POS_200mil_0010085021 9625,1675 r180 top
J13 "DNP. VERT 2POS .2\" TIN" MOLEX_2POS_200mil_0010085021 9675,4950 r0 top
JP1 "JUMPER_2WAY" HDR1X3 7635,1400 r0 top
JP2 "JUMPER_2WAY" HDR1X3 8160,2175 r270 top
JP3 "JUMPER_CONN" HDR1X2 4250,6925 r0 top
JP4 "JUMPER_2WAY" HDR1X3 4825,6925 r270 top
JP5 "JUMPER_2WAY" HDR1X3 2800,5225 r0 top
JP6 "JUMPER_2WAY" HDR1X3 2800,5450 r0 top
L1 "FERRITE CHIP 2A 300 OHM SMD" INDC1608L 8540.03,2800 r0 bottom
L2 "FERRITE CHIP 2A 300 OHM SMD" INDC1608L 7540.03,2972.88 r0 bottom
L3 "FERRITE CHIP 2A 300 OHM SMD" INDC1608L 7585,1700 r270 top
L4 "2.2uH" SRN6045 2350,6075 r180 top
L5 "2.2uH" SRN6045 9745,3950.35 r90 top
L6 "FERRITE CHIP 2A 300 OHM SMD" INDC1608L 5925.79,5040 r0 bottom
L7 "FERRITE CHIP 2A 300 OHM SMD" INDC1608L 8515.02,4975 r270 bottom
Q1 "20V 6.5A SOT23" SOT95P305X200-3M 2525,6975 r90 top
Q2 "20V 6.5A SOT23" SOT95P305X200-3M 2775,6975 r90 top
Q3 "20V 6.5A SOT23" SOT95P305X200-3M 8925,7050 r90 top
Q4 "20V 6.5A SOT23" SOT95P305X200-3M 8750,7050 r90 top
Q5 "20V 6.5A SOT23" SOT95P305X200-3M 8575,7050 r90 top
Q6 "20V 6.5A SOT23" SOT95P305X200-3M 3575,7075 r90 top
Q7 "20V 6.5A SOT23" SOT95P305X200-3M 3300,7075 r90 top
Q8 "20V 6.5A SOT23" SOT95P305X200-3M 3025,7075 r90 top
Q9 "20V 6.5A SOT23" SOT95P305X200-3M 3850,7075 r90 top
R1_1 "1/10W 0.1% 0603" RESC1608L#1 8113.97,2526.97 r225 top (schematic designator R1)
R1_2 "1/10W 0.1% 0603" RESC1608L#2 7626.73,2647.8 r135 top (schematic designator R1)
R2_1 "1/10W 0.1% 0603" RESC1608L#1 8220.03,2633.03 r225 top (schematic designator R2)
R2_2 "1/10W 0.1% 0603" RESC1608L#1 7718.03,2526.97 r135 top (schematic designator R2)
R3 "100 1/10W 1%" RESC1608L#1 7910,2450 r180 top
R4 "47K 1/10W 5%" RESC1608L#1 7775,1300 r0 top
R5 "47K 1/10W 5%" RESC1608L#1 6075,5525 r180 top
R6 "75k" 0402 1575,6265 r270 top
R7 "22.1k" 0402 1575,6165 r270 top
R8 "30.9k" 0402 9915,4665.35 r180 top
R9 "47K 1/10W 5%" RESC1608L#1 4500,6925 r180 top
R10 "22.1k" 0402 9815,4665.35 r180 top
R11 "34K  1/10W 5%" RESC1608L#1 4025,6750 r270 top
R12 "100K 1/10W 5%" RESC1608L#1 3950,6750 r90 top
R13 "47K 1/10W 5%" RESC1608L#1 4650,6925 r0 top
R14 "40.2k 1/10W 1%" RESC1608L#1 4550,6525 r180 top
R15 "10.0 1/10W 1%" RESC1608L#1 4675,6525 r180 top
R16 "100 1/10W 1%" RESC1608L#1 2525,7200 r0 top
R17 "100 1/10W 1%" RESC1608L#1 2775,7200 r0 top
R18 "47K 1/10W 5%" RESC1608L#1 9475,7050 r0 top
R19 "220 1/10W 5%" RESC1608L#1 8925,7175 r0 top
R20 "100 1/10W 1%" RESC1608L#1 8925,7250 r0 top
R21 "100 1/10W 1%" RESC1608L#1 8925,7325 r0 top
R22 "100 1/10W 1%" RESC1608L#1 2375,7200 r0 top
R23 "47K 1/10W 5%" RESC1608L#1 8900,6900 r180 top
R24 "47K 1/10W 5%" RESC1608L#1 8730,6895 r0 top
R25 "47K 1/10W 5%" RESC1608L#1 8555,6895 r0 top
R26 "100 1/10W 1%" RESC1608L#1 3625,7225 r180 top
R27 "100 1/10W 1%" RESC1608L#1 3350,7225 r180 top
R28 "100 1/10W 1%" RESC1608L#1 3075,7225 r180 top
R29 "100 1/10W 1%" RESC1608L#1 3900,7225 r180 top
R30 "49.9 1/4W 1%" RESC3216L 8035,1875 r180 top
R31 "47K 1/10W 5%" RESC1608L#1 3575,6900 r0 top
R32 "47K 1/10W 5%" RESC1608L#1 3300,6900 r0 top
R33 "47K 1/10W 5%" RESC1608L#1 3025,6900 r0 top
R34 "47K 1/10W 5%" RESC1608L#1 3850,6900 r0 top
R35 "47K 1/10W 5%" RESC1608L#1 2825,5325 r180 top
R36 "100 1/10W 1%" RESC1608L#1 7885,1925 r180 top
R37 "100 1/10W 1%" RESC1608L#1 8260,2150 r90 top
R38 "100 1/10W 1%" RESC1608L#1 8260,1875 r90 top
R39 "100 1/10W 1%" RESC1608L#1 8260,2000 r90 top
R40 "100 1/10W 1%" RESC1608L#1 8335,1875 r270 top
R41 "100 1/10W 1%" RESC1608L#1 2750,5550 r0 top
R42 "100 1/10W 1%" RESC1608L#1 3050,5550 r0 top
R43 "49.9 1/4W 1%" RESC3216L 3200,4975 r90 top
SW1 "SW-PB" SPST_SW_FSM4JH 4275,7250 r180 top
SW2 "SW-PB" SPST_SW_FSM4JH 9375,7250 r180 top
T1_1 "Balun_Pulse_CX2156NL" CX2156NL_SMD5 8775,1975 r135 top (schematic designator T1)
T1_2 "Balun_Pulse_CX2156NL" CX2156NL_SMD5 7025,1935 r45 top (schematic designator T1)
TP1 "TESTPOINT_CW" PIN1 6500,2000 r0 top
TP2 "TESTPOINT_CW" PIN1 9250,2000 r0 top
TP3 "TESTPOINT_CW" PIN1 1700,1100 r0 top
TP4 "TESTPOINT_CW" PIN1 9800,3300 r0 top
TP5 "TESTPOINT_CW" PIN1 4800,1100 r0 top
TP6 "TESTPOINT_CW" PIN1 1625,5375 r0 top
TP7 "TESTPOINT_CW" PIN1 5750,5500 r90 top
TP8 "TESTPOINT_CW" PIN1 9725,6250 r90 top
TP9 "TESTPOINT_CW" PIN1 4625,6125 r0 top
TP10 "TESTPOINT_CW" PIN1 3550,5450 r0 top
TP11 "TESTPOINT_CW" PIN1 9175,6175 r90 top
TP12 "TESTPOINT_CW" PIN1 9175,6275 r90 top
TP13 "TESTPOINT_CW" PIN1 5815,6765 r90 top
TP14 "TESTPOINT_CW" PIN1 9175,6375 r90 top
U1 "FXO-LC736R-250MHz" FXO-LC736R-SMD_6 7835,1650 r90 top
U2 "ADS62P49_SINGLE" VQFN-64 7880,2910 r0 top
U3 "ICS854S01I" VFQFN16_CUSTOM 7910,2075 r90 top
U4 "TPS54428DDAR" R-PDSO-G8 1925,6150 r0 top
U5 "LP3962" SOT223-5N 9350,2400 r0 top
U6 "TPS54428DDAR" R-PDSO-G8 9795,4375.35 r270 top
U7 "LTC1728ES5-3.3" SOT23_5L_CUSTOM 4150,6725 r270 top
U8 "TL331 Comparator" SOT23_5L_CUSTOM 4650,6675 r90 top
U9 "MicroZed (Z7010)" MICROZED_MATINGSIDE 6450,6150 r0 top locked
U10 "SN74LVC244A" TSOP64P640X120-20N 5225,5600 r0 top
U11 "SN74LVC244A" TSOP64P640X120-20N 4600,5600 r0 top
U12 "SN74LVC244A" TSOP64P640X120-20N 3975,5600 r0 top
U13 "LVCMOS 25MHz Clock" FNETHE025_4SMD 2450,5125 r0 top
U14 "2:1 CLOCK MUX, 250MHz MAX" SOP65P780-8M 2900,5025 r180 top
U15 "CLOCK FANOUT 1:6, 100MHz Max" TSOP65P640-14AM 2614.17,4775 r0 top
U16 "SN74LVC1T45" SOT23_6_CUSTOM 9300,5525 r270 top

## Footprints (in the part's own frame and the unit in brackets; to place one, negate y for a bottom-side part, rotate by r counter-clockwise, add the part's x,y. Pads: shape width x height; smd on the part's side, far side on the other; paste and mask are expansions set on the pad)
0402 [mil]
  rect 22x24 smd: 1(-16.5,0) 2(16.5,0)
  body extent -22,-12 22,12, height 20
1206 [mil]
  rect 44x71 smd: 1(-59,0) 2(59,0)
  silkscreen extent -24,-36 24,36, body extent -68,-35 67,36, height 40
1210 [mil]
  rect 44x106 smd: 1(-59,0) 2(59,0)
  silkscreen extent -24,-53 24,53, body extent -67,-53 68,52, height 40
CAPC1608L [mm] "Chip Capacitor, Body 1.6x0.8mm, IPC High Density"
  rect 0.8x0.9 smd: 1(-0.7,0) 2(0.7,0)
  body extent -0.87,-0.47 0.87,0.47, height 1.3
CAPC2012L [mm] "Chip Capacitor, Body 2.0x1.3mm, IPC High Density"
  rect 1.1x1.4 smd: 1(-0.75,0) 2(0.75,0)
  body extent -1.1,-0.72 1.1,0.72, height 1.4
CAPC3216L [mm] "Chip Capacitor, Body 3.2x1.6mm, IPC High Density"
  rect 1.1x1.7 smd: 1(-1.35,0) 2(1.35,0)
  silkscreen extent -0.4,-0.75 0.4,0.75, body extent -1.7,-0.9 1.7,0.9, height 1.3
CAPPOL3216 [mm] "Chip LED 2-Leads, Body 3.2x1.6mm, IPC Low Density"
  rrect50% 1.75x1.6 smd: 1(-1.875,0)
  rect 1.75x1.6 smd: 2(1.875,0)
  silkscreen extent -2.29,-1.78 0.6,0.7, body extent -1.65,-0.95 1.65,0.95, height 1.55
CX2156NL_SMD5 [mm] "SOT23, 5-Leads, Body 4.5x5.4mm (max), Pitch 1.50mm, IPC Low Density"
  rrect50% 1.55x1 smd: 1(-2.275,1.5)
  rect 1.55x1 smd: 2(-2.275,0) 3(-2.275,-1.5) 4(2.275,-1.5) 5(2.275,1.5)
  silkscreen extent -2.4,-2.25 1.2,2.65, body extent -1.47,-2.25 1.47,2.25, height 3
FNETHE025_4SMD [mm] "QFN, 6-Leads, Body 7.5x5.2mm (max), Pitch 3.00mm, Pitch1 2.54mm, IPC Low Density"
  rrect50% 2x1.8 smd: 1(-2.2,2.54)
  rect 2x1.8 smd: 2(-2.2,-2.54) 3(2.2,-2.54) 4(2.2,2.54)
  silkscreen extent -3.77,-3.75 2.6,3.75, body extent -2.6,-3.75 2.6,3.75, height 1.4
FXO-LC736R-SMD_6 [mm] "QFN, 6-Leads, Body 7.5x5.2mm (max), Pitch 3.00mm, Pitch1 2.54mm, IPC Low Density"
  rrect50% 2x1.8 smd: 1(-2.1,2.54)
  rect 2x1.8 smd: 2(-2.1,0) 3(-2.1,-2.54) 4(2.1,-2.54) 5(2.1,0) 6(2.1,2.54)
  silkscreen extent -3.77,-3.75 2.6,3.75, body extent -2.6,-3.75 2.6,3.75, height 1.4
HDR1X2 [mm] "Connector; Header; 2 Position"
  rect 1.5x1.5 hole 0.9: 1(0,0)
  round 1.5 hole 0.9: 2(2.54,0)
  silkscreen extent -1.27,-1.27 3.81,1.27
HDR1X3 [mm] "Connector; Header; 3 Position"
  rect 1.5x1.5 hole 0.9: 1(0,0)
  round 1.5 hole 0.9: 2(2.54,0) 3(5.08,0)
  silkscreen extent -1.27,-1.27 6.35,1.27
HDR1X6 [mm] "Connector; Header; 6 Position"
  rect 1.5x1.5 hole 0.9: 1(0,0)
  round 1.5 hole 0.9: 2(2.54,0) 3(5.08,0) 4(7.62,0) 5(10.16,0) 6(12.7,0)
  silkscreen extent -1.27,-1.27 13.97,1.27
HDR2X10 [mm] "Connector; Header; 10x2 Position"
  rect 1.5x1.5 hole 0.9: 1(0,0)
  round 1.5 hole 0.9: 2(0,2.54) 3(2.54,0) 4(2.54,2.54) 5(5.08,0) 6(5.08,2.54) 7(7.62,0) 8(7.62,2.54) 9(10.16,0) 10(10.16,2.54) 11(12.7,0) 12(12.7,2.54) 13(15.24,0) 14(15.24,2.54) 15(17.78,0) 16(17.78,2.54) 17(20.32,0) 18(20.32,2.54) 19(22.86,0) 20(22.86,2.54)
  silkscreen extent -1.27,-1.27 24.13,3.81
HDR2X13 [mm] "Connector; Header; 13x2 Position"
  rect 1.5x1.5 hole 0.9: 1(0,0)
  round 1.5 hole 0.9: 2(0,2.54) 3(2.54,0) 4(2.54,2.54) 5(5.08,0) 6(5.08,2.54) 7(7.62,0) 8(7.62,2.54) 9(10.16,0) 10(10.16,2.54) 11(12.7,0) 12(12.7,2.54) 13(15.24,0) 14(15.24,2.54) 15(17.78,0) 16(17.78,2.54) 17(20.32,0) 18(20.32,2.54) 19(22.86,0) 20(22.86,2.54) 21(25.4,0) 22(25.4,2.54) 23(27.94,0) 24(27.94,2.54) 25(30.48,0) 26(30.48,2.54)
  silkscreen extent -1.27,-1.27 31.75,3.81
INDC1608L [mm] "Chip Inductor, Body 1.6x0.8mm, IPC High Density"
  rect 0.8x0.9 smd: 1(-0.7,0) 2(0.7,0)
  silkscreen extent -1.4,-0.35 -1.4,0.35, body extent -0.87,-0.48 0.87,0.48, height 0.55
LED3216X08M [mm] "Chip LED 2-Leads, Body 3.2x1.6mm, IPC Low Density"
  rect 1.75x1.6 smd: 1(-1.875,0) 2(1.875,0)
  silkscreen extent -2.29,-1.78 0.6,0.7, body extent -1.65,-0.85 1.65,0.85, height 0.75
MICROZED_MATINGSIDE [mm]
  oval 2x0.5 smd: 1(46.663,0) 2(42.263,0) 3(46.663,-0.8) 4(42.263,-0.8) 5(46.663,-1.6) 6(42.263,-1.6) 7(46.663,-2.4) 8(42.263,-2.4) 9(46.663,-3.2) 10(42.263,-3.2) 11(46.663,-4) 12(42.263,-4) 13(46.663,-4.8) 14(42.263,-4.8) 15(46.663,-5.6) 16(42.263,-5.6) 17(46.663,-6.4) 18(42.263,-6.4) 19(46.663,-7.2) 20(42.263,-7.2) 21(46.663,-8) 22(42.263,-8) 23(46.663,-8.8) 24(42.263,-8.8) 25(46.663,-9.6) 26(42.263,-9.6) 27(46.663,-10.4) 28(42.263,-10.4) 29(46.663,-11.2) 30(42.263,-11.2) 31(46.663,-12) 32(42.263,-12) 33(46.663,-12.8) 34(42.263,-12.8) 35(46.663,-13.6) 36(42.263,-13.6) 37(46.663,-14.4) 38(42.263,-14.4) 39(46.663,-15.2) 40(42.263,-15.2) 41(46.663,-16) 42(42.263,-16) 43(46.663,-16.8) 44(42.263,-16.8) 45(46.663,-17.6) 46(42.263,-17.6) 47(46.663,-18.4) 48(42.263,-18.4) 49(46.663,-19.2) 50(42.263,-19.2) 51(46.663,-20) 52(42.263,-20) 53(46.663,-20.8) 54(42.263,-20.8) 55(46.663,-21.6) 56(42.263,-21.6) 57(46.663,-22.4) 58(42.263,-22.4) 59(46.663,-23.2) 60(42.263,-23.2) 61(46.663,-24) 62(42.263,-24) 63(46.663,-24.8) 64(42.263,-24.8) 65(46.663,-25.6) 66(42.263,-25.6) 67(46.663,-26.4) 68(42.263,-26.4) 69(46.663,-27.2) 70(42.263,-27.2) 71(46.663,-28) 72(42.263,-28) 73(46.663,-28.8) 74(42.263,-28.8) 75(46.663,-29.6) 76(42.263,-29.6) 77(46.663,-30.4) 78(42.263,-30.4) 79(46.663,-31.2) 80(42.263,-31.2) 81(46.663,-32) 82(42.263,-32) 83(46.663,-32.8) 84(42.263,-32.8) 85(46.663,-33.6) 86(42.263,-33.6) 87(46.663,-34.4) 88(42.263,-34.4) 89(46.663,-35.2) 90(42.263,-35.2) 91(46.663,-36) 92(42.263,-36) 93(46.663,-36.8) 94(42.263,-36.8) 95(46.663,-37.6) 96(42.263,-37.6) 97(46.663,-38.4) 98(42.263,-38.4) 99(46.663,-39.2) 100(42.263,-39.2) 101(2.2,0) 102(-2.2,0) 103(2.2,-0.8) 104(-2.2,-0.8) 105(2.2,-1.6) 106(-2.2,-1.6) 107(2.2,-2.4) 108(-2.2,-2.4) 109(2.2,-3.2) 110(-2.2,-3.2) 111(2.2,-4) 112(-2.2,-4) 113(2.2,-4.8) 114(-2.2,-4.8) 115(2.2,-5.6) 116(-2.2,-5.6) 117(2.2,-6.4) 118(-2.2,-6.4) 119(2.2,-7.2) 120(-2.2,-7.2) 121(2.2,-8) 122(-2.2,-8) 123(2.2,-8.8) 124(-2.2,-8.8) 125(2.2,-9.6) 126(-2.2,-9.6) 127(2.2,-10.4) 128(-2.2,-10.4) 129(2.2,-11.2) 130(-2.2,-11.2) 131(2.2,-12) 132(-2.2,-12) 133(2.2,-12.8) 134(-2.2,-12.8) 135(2.2,-13.6) 136(-2.2,-13.6) 137(2.2,-14.4) 138(-2.2,-14.4) 139(2.2,-15.2) 140(-2.2,-15.2) 141(2.2,-16) 142(-2.2,-16) 143(2.2,-16.8) 144(-2.2,-16.8) 145(2.2,-17.6) 146(-2.2,-17.6) 147(2.2,-18.4) 148(-2.2,-18.4) 149(2.2,-19.2) 150(-2.2,-19.2) 151(2.2,-20) 152(-2.2,-20) 153(2.2,-20.8) 154(-2.2,-20.8) 155(2.2,-21.6) 156(-2.2,-21.6) 157(2.2,-22.4) 158(-2.2,-22.4) 159(2.2,-23.2) 160(-2.2,-23.2) 161(2.2,-24) 162(-2.2,-24) 163(2.2,-24.8) 164(-2.2,-24.8) 165(2.2,-25.6) 166(-2.2,-25.6) 167(2.2,-26.4) 168(-2.2,-26.4) 169(2.2,-27.2) 170(-2.2,-27.2) 171(2.2,-28) 172(-2.2,-28) 173(2.2,-28.8) 174(-2.2,-28.8) 175(2.2,-29.6) 176(-2.2,-29.6) 177(2.2,-30.4) 178(-2.2,-30.4) 179(2.2,-31.2) 180(-2.2,-31.2) 181(2.2,-32) 182(-2.2,-32) 183(2.2,-32.8) 184(-2.2,-32.8) 185(2.2,-33.6) 186(-2.2,-33.6) 187(2.2,-34.4) 188(-2.2,-34.4) 189(2.2,-35.2) 190(-2.2,-35.2) 191(2.2,-36) 192(-2.2,-36) 193(2.2,-36.8) 194(-2.2,-36.8) 195(2.2,-37.6) 196(-2.2,-37.6) 197(2.2,-38.4) 198(-2.2,-38.4) 199(2.2,-39.2) 200(-2.2,-39.2)
  round 5.08 hole 3.302: ""(-2.534,-66.512) ""(-2.534,27.468) ""(46.996,-66.512) ""(46.996,27.468)
  round 1.575 hole 1.2: ""(0,-41.7) ""(44.463,-41.7)
  round 1.2 hole 0.8: ""(0,2.5) ""(44.463,2.5)
  silkscreen extent -6.35,-70.5 50.8,31.1, body extent -6.48,-70.61 51.05,31.11, height 29.97
MOLEX_2POS_200mil_0010085021 [mil]
  round 94 hole 62: 1(100,0) 2(-100,0)
  silkscreen extent -180,-140 290,160, body extent -159,-120 159,130, height 586
MOLEX_SMBRA_731000103 [mm]
  round 2.4 hole 1.8: 1(0,0) 2(-2.54,2.54) 2(-2.54,-2.54) 2(2.54,2.54) 2(2.54,-2.54)
  silkscreen extent -2.54,-2.54 2.54,5.08, body extent -3.5,-3.5 3.5,11.61, height 9.57
MOLEX_SMBVERT_731000207 [mm]
  round 2.4 hole 1.8: 1(0,0) 2(-2.54,-2.54) 2(-2.54,2.54) 2(2.54,-2.54) 2(2.54,2.54)
  silkscreen extent -2.54,-2.54 2.54,2.54, body extent -3.5,-3.5 3.5,3.5, height 7.49
PIN1 [mm] "Connector; Plug"
  rect 1.5x1.5 hole 0.9: 1(0,0)
  silkscreen extent -1.4,-1.4 1.4,2.17
PJ-002BH [mm] "power connector"
  round 5 hole 3.5: 1(0,-3) 2(0,3) 3(-4.7,0)
  silkscreen extent -4.6,-3.2 4.5,10.6, body extent -4.57,-3.22 4.57,10.67, height 11.2
R-PDSO-G8 [mil]
  rect 78x18.14 smd: 1(-97,75) 2(-97,25) 3(-97,-25) 4(-97,-75) 5(97,-75) 6(97,-25) 7(97,25) 8(97,75)
  rect 94x122 smd paste-60.5: EPAD(0,0)
  silkscreen extent -78,-98 78,98, body extent -78,-98 78,98, height 55
RESC1608L#1 [mm] "Chip Resistor, Body 1.6x0.8mm, IPC High Density"
  rect 0.7x0.9 smd: 1(-0.75,0) 2(0.75,0)
  silkscreen extent -0.2,-0.35 0.2,0.35, body extent -0.85,-0.48 0.85,0.48, height 0.9
RESC1608L#2 [mm] "Chip Resistor, Body 1.6x0.8mm, IPC High Density"
  rect 0.7x0.9 smd: 1(-0.75,0.53) 2(0.75,0.53)
  silkscreen extent -0.2,0.18 0.2,0.88, body extent -0.85,0.06 0.85,1.01, height 0.9
RESC3216L [mm] "Chip Resistor, Body 3.1x1.6mm, IPC High Density"
  rect 1.1x1.7 smd: 1(-1.35,0) 2(1.35,0)
  silkscreen extent -0.4,-0.75 0.4,0.75, body extent -1.68,-0.87 1.68,0.87, height 2.54
RGBLED_1206_KINGSBRIGHT [mm]
  rrect50% 0.4x0.8 smd: 1(1.05,1.1) 3(-1.05,1.1) 4(-1.05,-1.1) 6(1.05,-1.1)
  rrect50% 0.8x0.4 smd: 2(0,1.8) 5(0,-1.8)
  Component Side lines w0.4: -0.2,1.7 ccw(c0,1.7) 0.2,1.7 ; -0.9,1.3 cw(c-0.9,1.1) -0.9,0.9 ; 0.9,1.3 ccw(c0.9,1.1) 0.9,0.9 ; -0.9,-0.9 cw(c-0.9,-1.1) -0.9,-1.3 ; 0.9,-0.9 ccw(c0.9,-1.1) 0.9,-1.3 ; -0.2,-1.7 cw(c0,-1.7) 0.2,-1.7
  silkscreen extent -1.02,-2.29 1.9,2.29, body extent -1,-1.6 1,1.6, height 0.75
SOP65P780-8M [mm] "SOP, 8-Leads, Body 3x5.3mm, Pitch 0.65mm, IPC Low Density"
  oval 2.4x0.45 smd: 1(-3.5,0.975) 2(-3.5,0.325) 3(-3.5,-0.325) 4(-3.5,-0.975) 5(3.5,-0.975) 6(3.5,-0.325) 7(3.5,0.325) 8(3.5,0.975)
  silkscreen extent -3.63,-1.65 1.9,1.87, body extent -2.8,-1.65 2.8,1.65, height 2
SOT23_5L_CUSTOM [mm] "SOT23, 5-Leads, Body 3.1x3.0mm (max), Pitch 0.95mm, IPC Low Density"
  rrect50% 1.3x0.7 smd: 1(-1.2,0.95)
  rect 1.3x0.7 smd: 2(-1.2,0) 3(-1.2,-0.95) 4(1.2,-0.95) 5(1.2,0.95)
  silkscreen extent -1.32,-1.55 0.15,1.98, body extent -0.87,-1.55 0.87,1.55, height 1.3
SOT23_6_CUSTOM [mm]
  rrect50% 1.25x0.7 smd: 1(-1.2,0.95)
  rect 1.25x0.7 smd: 2(-1.2,0) 3(-1.2,-0.95) 4(1.2,-0.95) 5(1.2,0) 6(1.2,0.95)
  silkscreen extent -1.32,-1.55 0.2,1.98, body extent -0.87,-1.55 0.87,1.55, height 1.3
SOT95P305X200-3M [mm] "SOT23, 3-Leads, Body 3.2x3.2mm (max), Pitch 0.95mm, IPC Low Density"
  rrect50% 1.8x0.7 smd: 1(-1.075,0.95)
  rect 1.8x0.7 smd: 2(-1.075,-0.95) 3(1.075,0)
  silkscreen extent -1.2,-1.6 0.95,1.97, body extent -0.95,-1.6 0.95,1.6, height 2
SOT223-5N [mm]
  rrect50% 1.85x1 smd: 1(-3.15,2.25)
  rect 1.85x1 smd: 2(-3.15,0.75) 3(-3.15,-0.75) 4(-3.15,-2.25)
  rect 1.85x3.5 smd: 5(3.15,0)
  silkscreen extent -3.27,-3.35 1.75,3.42, body extent -1.8,-3.35 1.8,3.35, height 1.6
SPST_SW_FSM4JH [mm]
  round 1.8 hole 1: 1(-3.25,2.25) 1(3.25,2.25) 2(-3.25,-2.25) 2(3.25,-2.25)
  silkscreen extent -2,-2.5 2,2.5, body extent -3,-3 3,3, height 4
SRN6045 [mm]
  rect 2x6 smd: 1(-2.15,0) 2(2.15,0)
  silkscreen extent -0.82,-3 0.82,3, body extent -3,-3 3,3, height 3.81
TSOP64P640X120-20N [mm] "TSOP, 20-Leads, Body 6.6x4.5mm (max), Pitch 0.64mm, IPC Medium Density"
  oval 1.8x0.25 smd: 1(-2.65,2.88) 2(-2.65,2.24) 3(-2.65,1.6) 4(-2.65,0.96) 5(-2.65,0.32) 6(-2.65,-0.32) 7(-2.65,-0.96) 8(-2.65,-1.6) 9(-2.65,-2.24) 10(-2.65,-2.88) 11(2.65,-2.88) 12(2.65,-2.24) 13(2.65,-1.6) 14(2.65,-0.96) 15(2.65,-0.32) 16(2.65,0.32) 17(2.65,0.96) 18(2.65,1.6) 19(2.65,2.24) 20(2.65,2.88)
  silkscreen extent -2.77,-3.3 1.1,3.68, body extent -2.25,-3.3 2.25,3.3, height 1.2
TSOP65P640-14AM [mm] "TSOP, 14-Leads, Body 5x4.4mm, Pitch 0.65mm, IPC Low Density"
  oval 2x0.35 smd: 1(-2.9,1.95) 2(-2.9,1.3) 3(-2.9,0.65) 4(-2.9,0) 5(-2.9,-0.65) 6(-2.9,-1.3) 7(-2.9,-1.95) 8(2.9,-1.95) 9(2.9,-1.3) 10(2.9,-0.65) 11(2.9,0) 12(2.9,0.65) 13(2.9,1.3) 14(2.9,1.95)
  silkscreen extent -3.02,-2.55 1.5,2.8, body extent -2.25,-2.55 2.25,2.55, height 1.1
VFQFN16_CUSTOM [mm] "QFN, 16-Leads, Body 3.1x3.1mm (max), Pitch 0.50mm, IPC Low Density"
  oval 0.8x0.25 smd mask+0.076: 1(-1.626,0.75) 2(-1.626,0.25) 3(-1.626,-0.25) 4(-1.626,-0.75) 9(1.626,-0.75) 10(1.626,-0.25) 11(1.626,0.25) 12(1.626,0.75)
  oval 0.25x0.8 smd mask+0.076: 5(-0.75,-1.626) 6(-0.25,-1.626) 7(0.25,-1.626) 8(0.75,-1.626) 13(0.75,1.626) 14(0.25,1.626) 15(-0.25,1.626) 16(-0.75,1.626)
  rect 1.8x1.8 smd mask+0.076: 17(0,0)
  silkscreen extent -2.62,-1.55 1.55,1.55, body extent -1.55,-1.55 1.55,1.55, height 1
VQFN-64 [mm] "QFN, 64-Leads, Body 9.1x9.1mm (max), Pitch 0.50mm, IPC Medium Density"
  oval 1.13x0.25 smd: 1(-4.83,3.75) 2(-4.83,3.25) 3(-4.83,2.75) 4(-4.83,2.25) 5(-4.83,1.75) 6(-4.83,1.25) 7(-4.83,0.75) 8(-4.83,0.25) 9(-4.83,-0.25) 10(-4.83,-0.75) 11(-4.83,-1.25) 12(-4.83,-1.75) 13(-4.83,-2.25) 14(-4.83,-2.75) 15(-4.83,-3.25) 16(-4.83,-3.75) 33(4.83,-3.75) 34(4.83,-3.25) 35(4.83,-2.75) 36(4.83,-2.25) 37(4.83,-1.75) 38(4.83,-1.25) 39(4.83,-0.75) 40(4.83,-0.25) 41(4.83,0.25) 42(4.83,0.75) 43(4.83,1.25) 44(4.83,1.75) 45(4.83,2.25) 46(4.83,2.75) 47(4.83,3.25) 48(4.83,3.75)
  oval 0.25x1.13 smd: 17(-3.75,-4.83) 18(-3.25,-4.83) 19(-2.75,-4.83) 20(-2.25,-4.83) 21(-1.75,-4.83) 22(-1.25,-4.83) 23(-0.75,-4.83) 24(-0.25,-4.83) 25(0.25,-4.83) 26(0.75,-4.83) 27(1.25,-4.83) 28(1.75,-4.83) 29(2.25,-4.83) 30(2.75,-4.83) 31(3.25,-4.83) 32(3.75,-4.83) 49(3.75,4.83) 50(3.25,4.83) 51(2.75,4.83) 52(2.25,4.83) 53(1.75,4.83) 54(1.25,4.83) 55(0.75,4.83) 56(0.25,4.83) 57(-0.25,4.83) 58(-0.75,4.83) 59(-1.25,4.83) 60(-1.75,4.83) 61(-2.25,4.83) 62(-2.75,4.83) 63(-3.25,4.83) 64(-3.75,4.83)
  rect 7.5x7.5 smd: 65(0,0)
  silkscreen extent -6.25,-4.6 4.6,4.6, body extent -4.58,-4.57 4.57,4.58, height 1

## Part data
C1_1 C1_2 C2_1 C2_2 C3_1 C3_2 C5 C7 C8 C9 C10 C11 C12 C13 C14 C16 C17 C18 C19 C20 C21 C29 C31 C37 C38 C39 C42 C43 C44 C45 C46 C47 C48 C49 C50 C51 C52 C53 C54 C56 C57 C58 C59 C60 C61 C62 C63 C64 C65 C66 C67 C68 C70 C71 C72 C73 C74 C75 C76 C77: library part Cap, "Capacitor"
C4 C6 C15 C22 C40 C41 C55 C69: library part "Cap Pol3", "Polarized Capacitor (Surface Mount)"
C23 C30: library part C1005X5R1A104K
C24 C32: library part GRM1555C1E5R1CA01D, "GRM1555C1E5R1CA0"
C25 C33: library part GRM31CR60J476ME19L, "GRM31CR60J476ME1"
C26 C34: library part C3225X5R1A226M, "C3225X5R1A226M"
C27 C35: library part GRM155R61A105KE15D, "GRM155R61A105KE1"
C28 C36: library part GRM155R71E822KA01D, "GRM155R71E822KA0"
D1 D2 D3 D5 D6 D7 D8: library part LED0, "Typical INFRARED GaAs LED"
D4: "The Blue source color devices are made with InGaN Light     Emitting Diode.     The Green source color devices are made with InGaN     on Sapphire Light Emitting Diode.     The Hyper Red source color devices are made with Al-  GaInP on GaAs substrate Ligh"
J1_1 J1_2 J1_3 J1_4 J1_5 J1_6: "Header, 10-Pin, Dual row"
J2_1 J2_2 J2_3 J2_4 J2_5 J2_6 J3 J6 J7 J8: library part SMB, "SMB Straight Connector"
J4: library part "Header 3", "Header, 3-Pin"
J5 J11 J12 J13: library part "Header 2", "Header, 2-Pin"
J9: "Header, 13-Pin, Dual row"
J10: "Header, 6-Pin"
L1 L2 L3 L6 L7: library part "Inductor Iron", "Magnetic-Core Inductor"
L4 L5: library part SRN6045-2R2Y, "SRN6045-2R2Y"
Q1 Q2 Q3 Q4 Q5 Q6 Q7 Q8 Q9: library part MOSFET-N, "N-Channel MOSFET 1.8V Logic Level"
R1_1 R1_2 R2_1 R2_2 R3 R4 R5 R9 R11 R12 R13 R14 R15 R16 R17 R18 R19 R20 R21 R22 R23 R24 R25 R26 R27 R28 R29 R30 R31 R32 R33 R34 R35 R36 R37 R38 R39 R40 R41 R42 R43: library part Res3, "Resistor"
R6: library part CRCW040275K0FKED, "CRCW040275K0FKED"
R7 R10: library part CRCW040222K1FKED, "CRCW040222K1FKED"
R8: library part CRCW040275K0FKED, "CRCW040230K9FKED"
SW1 SW2: "Switch"
T1_1 T1_2: "TRANSFORMR BALUN 2.3-2700MHZ SMD"
U1: "OSC 250 MHZ 3.3V LVDS SMD"
U2: "IC ADC DUAL 14BIT 250MSPS 64VQFN"
U4 U6: "Imported"
U8: library part TL331
U9: library part MicroZed, "MicroZed is a low-cost development board based on the Xilinx Zynq-7000 All Programmable SoC. Its unique design allows it to be used as both a stand-alone evaluation board for basic SoC experimentation, or combined with a carrier card as an embeddable syst"
U10 U11 U12: "This octal buffer/line driver is operational at 1.5-V to  3.6-V V CC , but is designed specifically for 1.65-V to  3.6-V V CC operation"
U13: library part FNETHE025
U14: library part ICS83052I
U15: library part CDCLVC1106, "Clock Fanout 1:6, 100MHz low-skew"
U16: "This single-bit noninverting bus transceiver uses two separate configurable power-supply rails. The A port is  designed to track VCCA. VCCA accepts any supply voltage from 1.65 V to 5.5 V. The B port is designed to track  VCCB. VCCB accepts any supply vol"

## Free pads (board coordinates)
  round 236.22 hole 130: 0(1200,1200) 0(1200,7200) 0(10250,1200) 0(10250,7200)

## Via types
v1: diameter 20, hole 10, Component Side to Solder Side, 768 vias
v2: diameter 28, hole 16, Component Side to Solder Side, 117 vias
v3: diameter 22, hole 10, Component Side to Solder Side, 104 vias
v4: diameter 50, hole 28, Component Side to Solder Side, 46 vias
v5: diameter 28, hole 16, Component Side to Solder Side, tented top, 6 vias
v6: diameter 25.98, hole 12.99, Component Side to Solder Side, tented top, 5 vias
v7: diameter 25.98, hole 10, Component Side to Solder Side, tented top, 1 vias

## Nets (pads, with @x,y where several pads share a name; then routed paths per layer and width w, separated by ;. In a path a pad name is that pad's centre, name@x,y a point inside that pad or via, vN(x,y) a via of type N, cw(c..) or ccw(c..) an arc to the next point about the centre after c; other vN are vias at no path point)
5V: C22.1 C26.1 C31.2 C34.1 C38.1 C41.1 C42.1 C43.1 C44.1 C45.1 C50.1 C51.1 C52.1 C53.1 C54.1 D1.1 D5.1 D6.1 D7.1 D8.1 J1_1.15 J1_1.17 J1_1.19 J1_2.15 J1_2.17 J1_2.19 J1_3.15 J1_3.17 J1_3.19 J1_4.15 J1_4.17 J1_4.19 J1_5.15 J1_5.17 J1_5.19 J1_6.15 J1_6.17 J1_6.19 J4.1 J5.1 J9.1 R9.1 R13.1 R14.2 R16.2 R17.2 R19.2 R20.2 R21.2 U4.8 U5.2 U6.8 U8.5 U9.57 U9.58 U9.59 U9.60 U9.112 U9.157 U9.158 U9.159 U9.160 | length 3582.8
  Component Side w8: v1(2175,7325) D1.1@2251.18,7325 ; R16.2@2554.53,7200 v1(2600,7200) ; R17.2@2804.53,7200 v1(2875,7200) ; D7.1@3178.82,7315 3178.82,7246.18 v1(3200,7225) ; D6.1@3453.82,7315 3453.82,7246.18 v1(3475,7225) ; D5.1@3728.82,7315 3728.82,7221.18 v1(3750,7200) ; D8.1@4003.82,7315 4060,7315 v1(4075,7300) ; v1(4475,6525) R14.2@4520.47,6525 ; R9.1@4529.53,6925 v1(4575,6925) R13.1@4620.47,6925 ; v1(4575,6775) 4600,6775 4612.6,6762.4 U8.5@4612.6,6722.24 ; v1(4575,6825) C38.1@4622.44,6825 ; v1@6263.39,5236.61 v1@6265.39,5236.61 ; v1@6263.39,5268.11 U9.158@6363.39,5268.11 ; v1(6263.39,5992.52) U9.112@6363.39,5992.52 ; v1(6265.39,5239.61) 6292.01,5239.61 6295,5236.61 U9.160@6363.39,5236.61 ; U9.159@6536.61,5236.61 v1(6611.61,5236.61) ; U9.157@6536.61,5268.11 v1(6611.61,5268.11) ; v1(8013.89,5236.61) U9.60@8113.89,5236.61 ; v1(8013.89,5268.11) U9.58@8113.89,5268.11 8038.89,5268.11 ; U9.59@8287.11,5236.61 v1(8387.11,5236.61) ; U9.57@8287.11,5268.11 v1(8387.11,5268.11) ; R19.2@8954.53,7175 v1(9025,7175) ; R20.2@8954.53,7250 v1(9025,7250) ; R21.2@8954.53,7325 v1(9025,7325)
  Component Side w20: v2(1975,6575) 1973.82,6576.18 C22.1@1973.82,6650 ; v2(1975,6725) 1973.82,6723.82 C22.1@1973.82,6650 ; v1(2022,6292) v1(2022,6262) U4.8@2022,6225 ; v2(2050,6650) C22.1@1973.82,6650 ; 2065,6225 U4.8@2022,6225 ; v1(2071,6266) v1(2101,6266) C26.1@2175,6266 ; v1(2115,6225) v1(2090,6225) U4.8@2022,6225 ; v1(2150,6225) v1(2205,6225) v1(2175,6225) C26.1@2175,6266 ; v1(2294,6266) v1(2259,6266) C26.1@2175,6266 ; v1(9870,4130) 9911,4130 C34.1@9916,4125 ; v1(9870,4210) U6.8@9870,4278.35 v1(9913.35,4278.35) ; v1@9915,4040 v1(9916,4041) C34.1@9916,4125 ; v1(9916,4204) C34.1@9916,4125
  Component Side w40: v2(8990,2430) 8990.15,2429.85 C31.2@9066,2429.85 9144.85,2429.85 v2(9145,2430) 9145.47,2429.53 U5.2@9225.98,2429.53
  Solder Side w8: v2(6670,5325) 6672.56,5322.44 C52.1@6715,5322.44 ; v2(6718,5150) C42.1@6718,5197.44 ; C50.1@6790,5322.44 6842.56,5322.44 v2(6845,5320) ; v2(6793,5150) C44.1@6793,5197.44 ; v2(6868,5150) C54.1@6868,5197.44 ; C45.1@7940.02,5272.44 C45.1@7942.46,5270
  other v1: 6265.39,5269.61
A3V3: C6.1 C15.1 C29.2 C37.1 J12.1 L1.2 L3.2 U5.3 U7.5 | length 8364.8
  Component Side w8: C37.1@4200,6577.56 4200,6615 4187.4,6627.6 U7.5@4187.4,6677.76 5022.76,6677.76 v1(5230,6885) ; v1(5675,6885) 5890,7100 6177.37,7100 6268.37,7009 6568.37,7009 7125,6452.37 7125,5825 7025,5725 v1(7025,2875) ; v2(7370,1670) v2@7370.47,1670.47 ; L3.2@7583.03,1670.47 L3.2@7585,1672.44 L3.2@7595,1672.44 ; v2@7637.56,1672.44 v2(7640,1670)
  Component Side w20: C29.2@9050,2327.56 v2(9050,2375) ; v2@9144.56,2369.56 v2(9145,2370)
  Component Side w22: v2@7370.47,1670.47 C15.1@7430,1670.47 ; v2(7430,1620) C15.1@7430,1670.47 ; L3.2@7583.03,1670.47 C15.1@7430,1670.47 ; v2(7585,1620) L3.2@7585,1672.44 ; L3.2@7595,1672.44 v2@7637.56,1672.44
  Component Side w40: v2(9145,2315) v2(9145,2370) 9145.47,2370.47 U5.3@9225.98,2370.47
  Solder Side w8: v1(5230,6885) v1(5675,6885) ; v1(7025,2875) 7295,2875 7325,2845 7325,2775 7300,2750 v4(7125,2750)
  Solder Side w20: L1.2@8567.59,2800 v2(8620,2800) ; C6.1@8569.56,2725 v2(8625,2725)
ADCCLK1_N: C5.1 R3.1 U3.10 | length 396.3
  Component Side w8: U3.10@7919.84,2136.02 7919.84,2160 7918,2161.84 7918,2398 7939.53,2419.53 R3.1@7939.53,2450 7939.53,2521.97 C5.1@7940,2522.44
ADCCLK1_P: C20.1 R3.2 U3.11 | length 396.3
  Component Side w8: C20.1@7880,2522.44 7880,2450.47 R3.2@7880.47,2450 7880.47,2421.53 7902,2400 7902,2161.84 7900.16,2160 U3.11@7900.16,2136.02
ADCCLK2_N: C5.2 U2.26 | length 167.9
  Component Side w8: U2.26@7909.53,2732.83 7909.53,2685.1 7918,2676.63 7918,2622 7940,2600 C5.2@7940,2577.56
ADCCLK2_P: C20.2 U2.25 | length 169.4
  Component Side w8: C20.2@7880,2577.56 7880,2600 7902,2622 7902,2670 7890,2682 7890,2732.68 U2.25@7889.84,2732.83
ADCCLK_N: R36.1 U1.4 U3.2 | length 295.7
  Component Side w11: U3.2@7900.16,2013.98 7900.16,1974.84 7914.53,1960.47 R36.1@7914.53,1925
  Component Side w16.83: R36.1@7914.53,1925 7914.53,1860.47 7935,1840 U1.4@7935,1732.68
ADCCLK_P: R36.2 U1.5 U3.1 | length 300.1
  Component Side w11: R36.2@7855.47,1925 7855.47,1955.47 7880.47,1980.47 U3.1@7880.47,2013.98
  Component Side w16.83: U1.5@7835,1732.68 7835,1835 7855.47,1855.47 R36.2@7855.47,1925
CLK_A3V3: C16.1 C17.1 C18.1 C19.1 JP1.1 L3.1 R37.1 R38.1 U1.6 U3.8 U3.13 | length 618.6
  Component Side w8: C17.1@7737.56,1825 v2(7785,1825) ; C16.1@7737.56,1900 v2(7785,1900) ; C19.1@7760,2102.56 v2(7760,2145) ; v5(7825,2155) 7846,2134 U3.13@7846,2104.53 ; U3.8@7971.02,2104.53 8005.47,2104.53 v5(8015,2095) ; C18.1@8060,2102.56 v2(8060,2160) ; v2(8260,1800) R38.1@8260,1845.47 ; v2(8260,2085) R37.1@8260,2120.47
  Component Side w16: v2(7655,1735) 7657.32,1732.68 U1.6@7735,1732.68
  Component Side w20: v2(7540,1775) 7565,1775 ; L3.1@7585,1727.56 7585,1755 7565,1775 ; 7595,1765 7605,1775 ; v2(7625,1775) 7605,1775 ; 7565,1775 v2(7585,1775) 7605,1775
CLK_OUT0: J2_1.1 U15.3 | length 771.6
  Component Side w16.8: J2_1.1@2125,4375 2125,4750 2176.4,4801.4 2499.19,4801.4 U15.3@2500,4800.59
CLK_OUT1: J2_2.1 U15.6 | length 695.2
  Component Side w16.8: U15.6@2500,4723.82 2551.18,4723.82 2575,4700 2575,4400 2600,4375 J2_2.1@2875,4375
CLK_OUT2: J2_3.1 U15.14 | length 1561.8
  Component Side w16.8: U15.14@2728.35,4851.77 2727.56,4850.98 2665.91,4850.98 2600,4785.08 2600,4575 2625,4550 3600,4550 3625,4525 J2_3.1@3625,4375
CLK_OUT3: J2_4.1 U15.13 | length 2245.3
  Component Side w16.8: U15.13@2728.35,4826.18 2676.18,4826.18 2625,4775 2625,4625 2650,4600 4350,4600 4375,4575 J2_4.1@4375,4375
CLK_OUT4: J2_5.1 U15.11 | length 2871.3
  Component Side w16.8: U15.11@2728.35,4775 2675,4775 2650,4750 2650,4675 2690,4635 5050,4635 5125,4560 J2_5.1@5125,4375
CLK_OUT5: J2_6.1 U15.9 | length 3467.1
  Component Side w16.8: U15.9@2728.35,4723.82 2728.57,4723.6 2835.94,4723.6 2836.16,4723.82 2951.18,4723.82 2975,4700 5850,4700 5875,4675 J2_6.1@5875,4375